# Altium PCB FMDET.PcbDoc
Units mm, origin at the board's own origin, x right, y up, seen from the top; angles counter-clockwise.
Board outline 50 x 50 mm, 4 copper layers (Top Layer, Layer 2, Layer 3, Bottom Layer), stack 1.513 mm thick; 70 components, 34 nets, 163 pads, 173 vias.
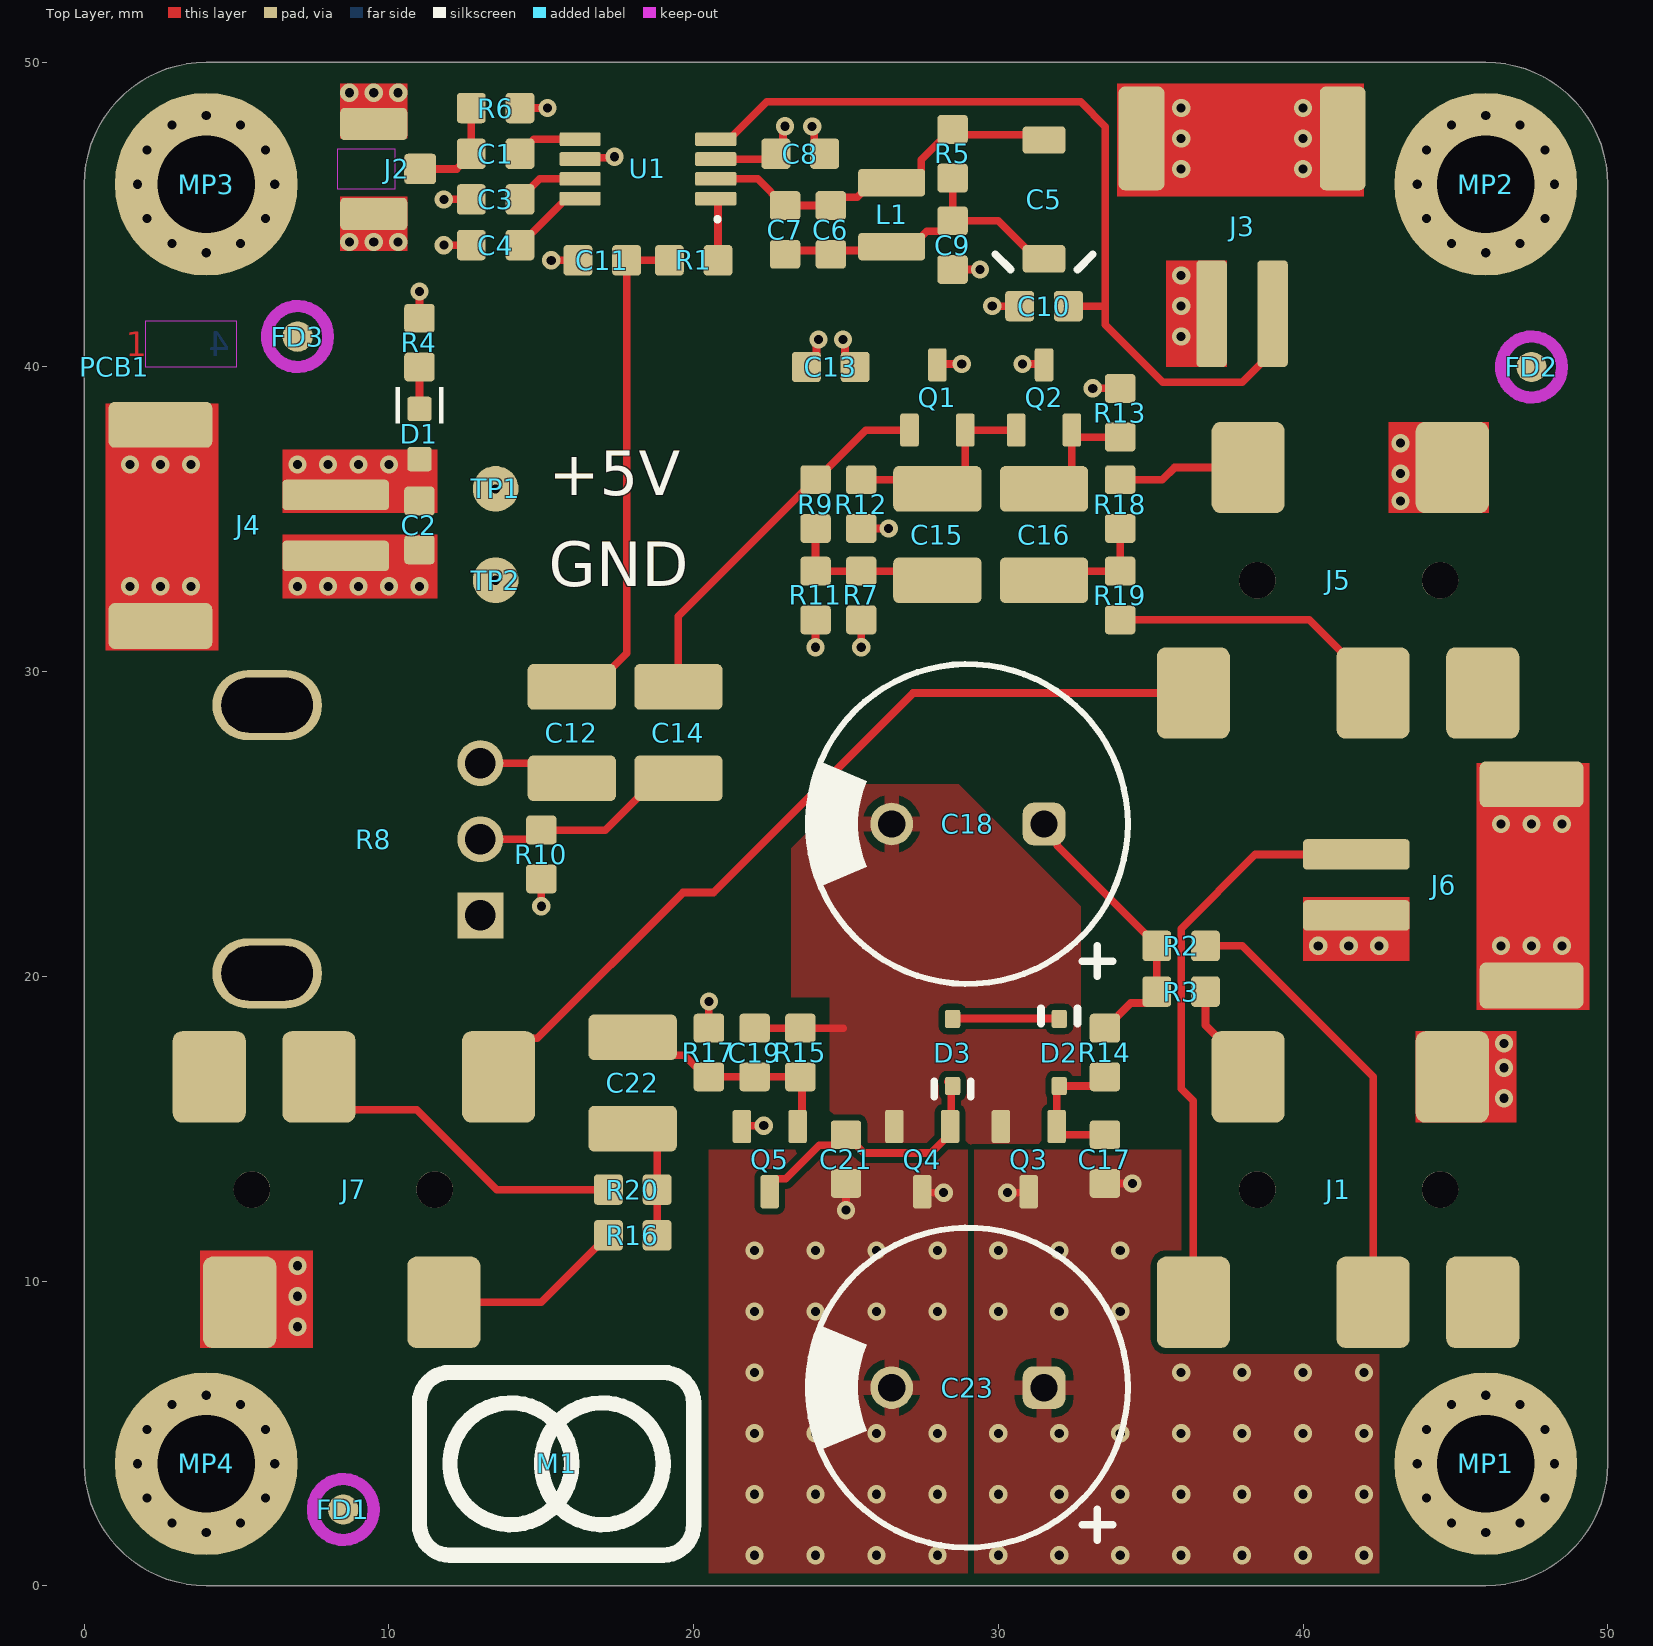
[diagram p0: Top Layer view]
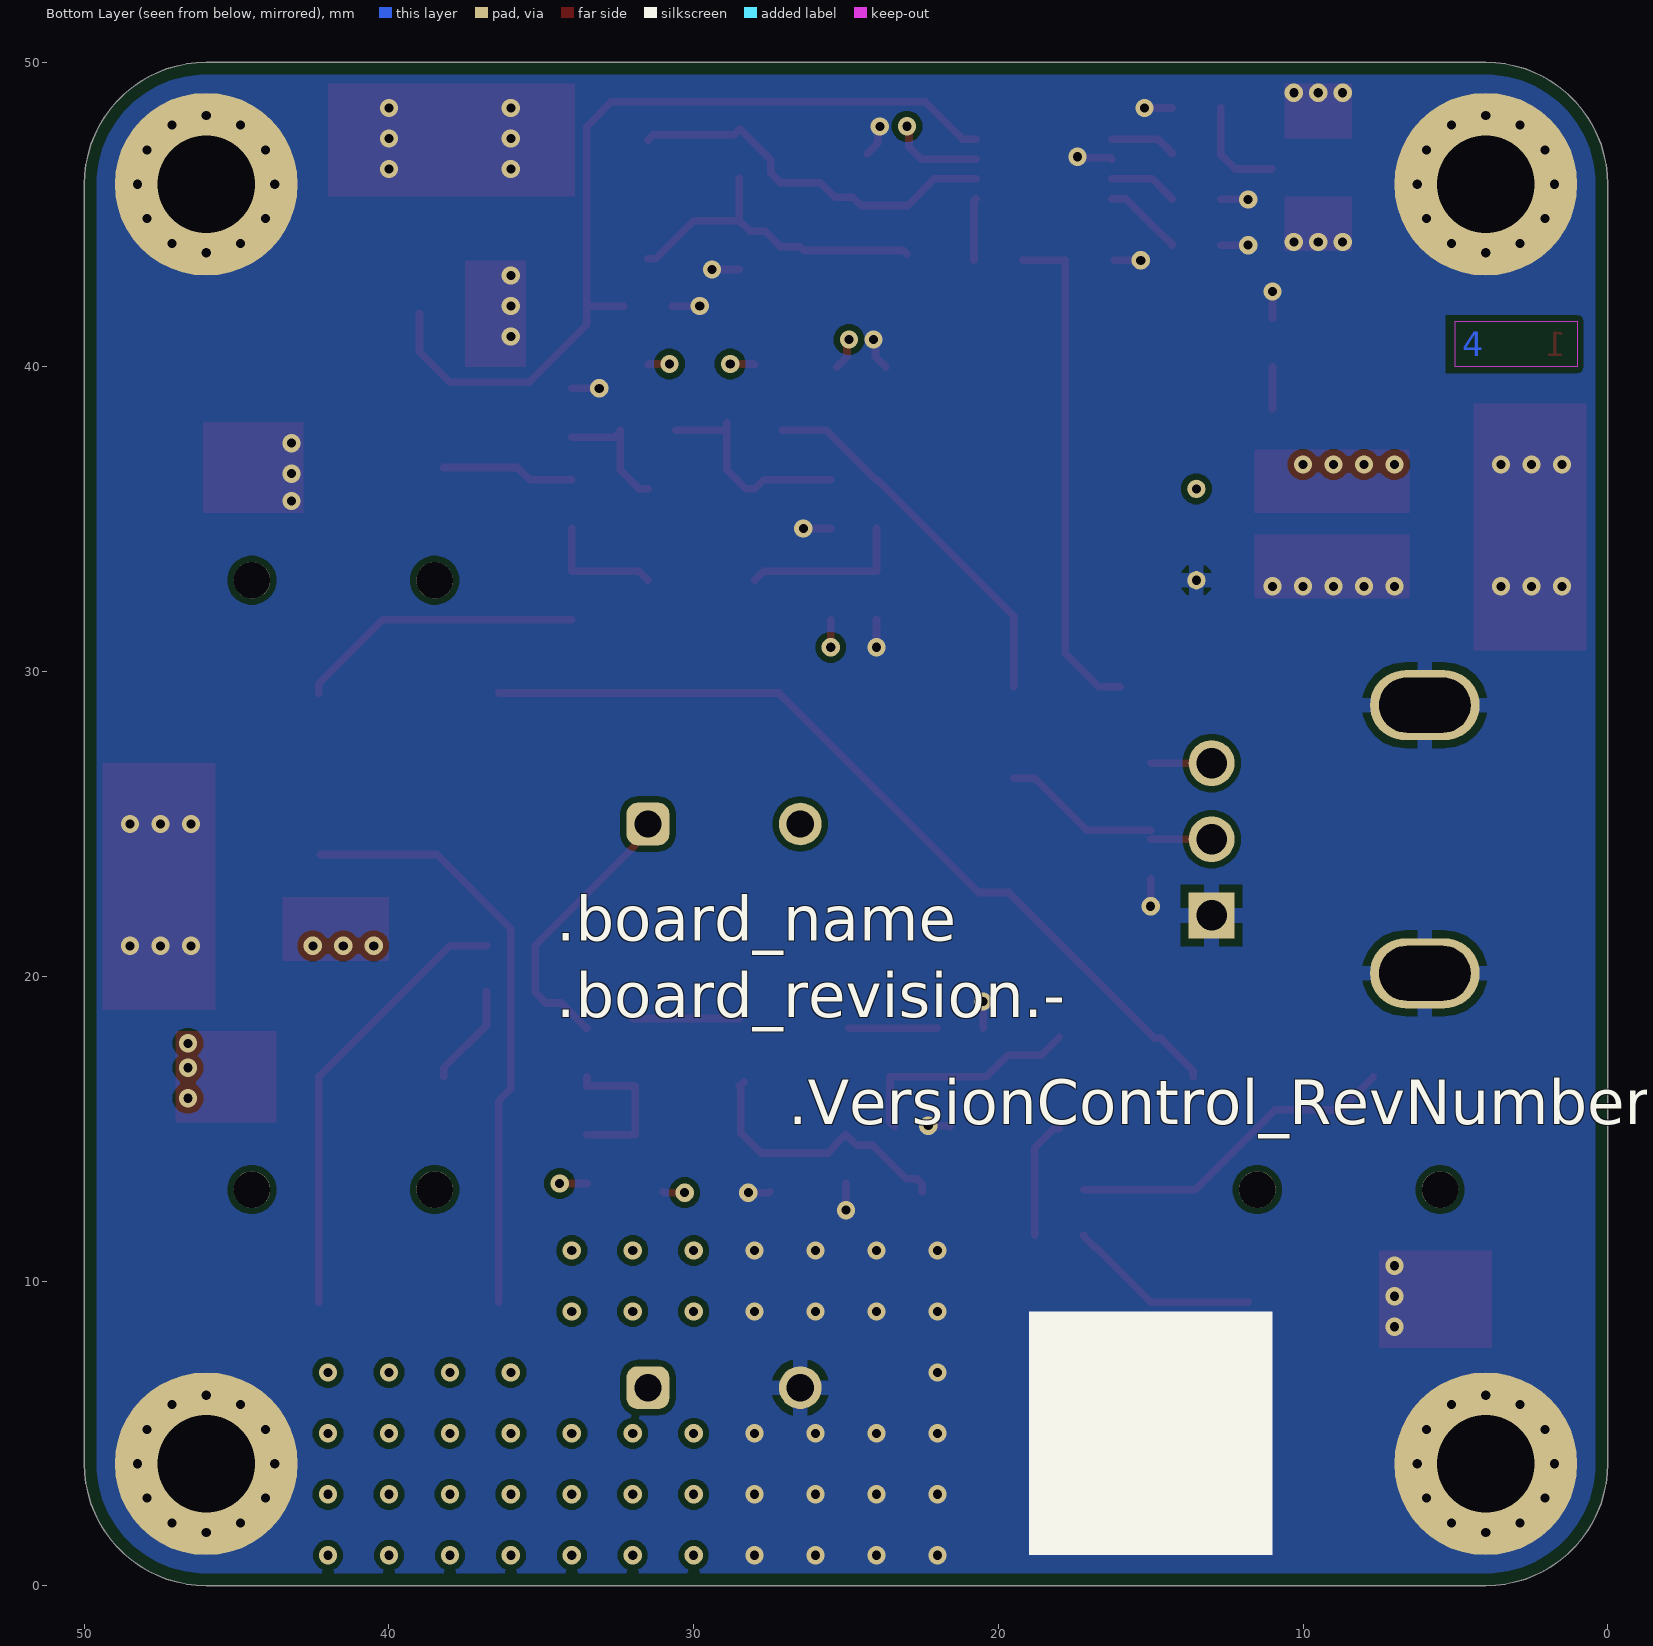
[diagram p1: Bottom Layer view, seen from below]
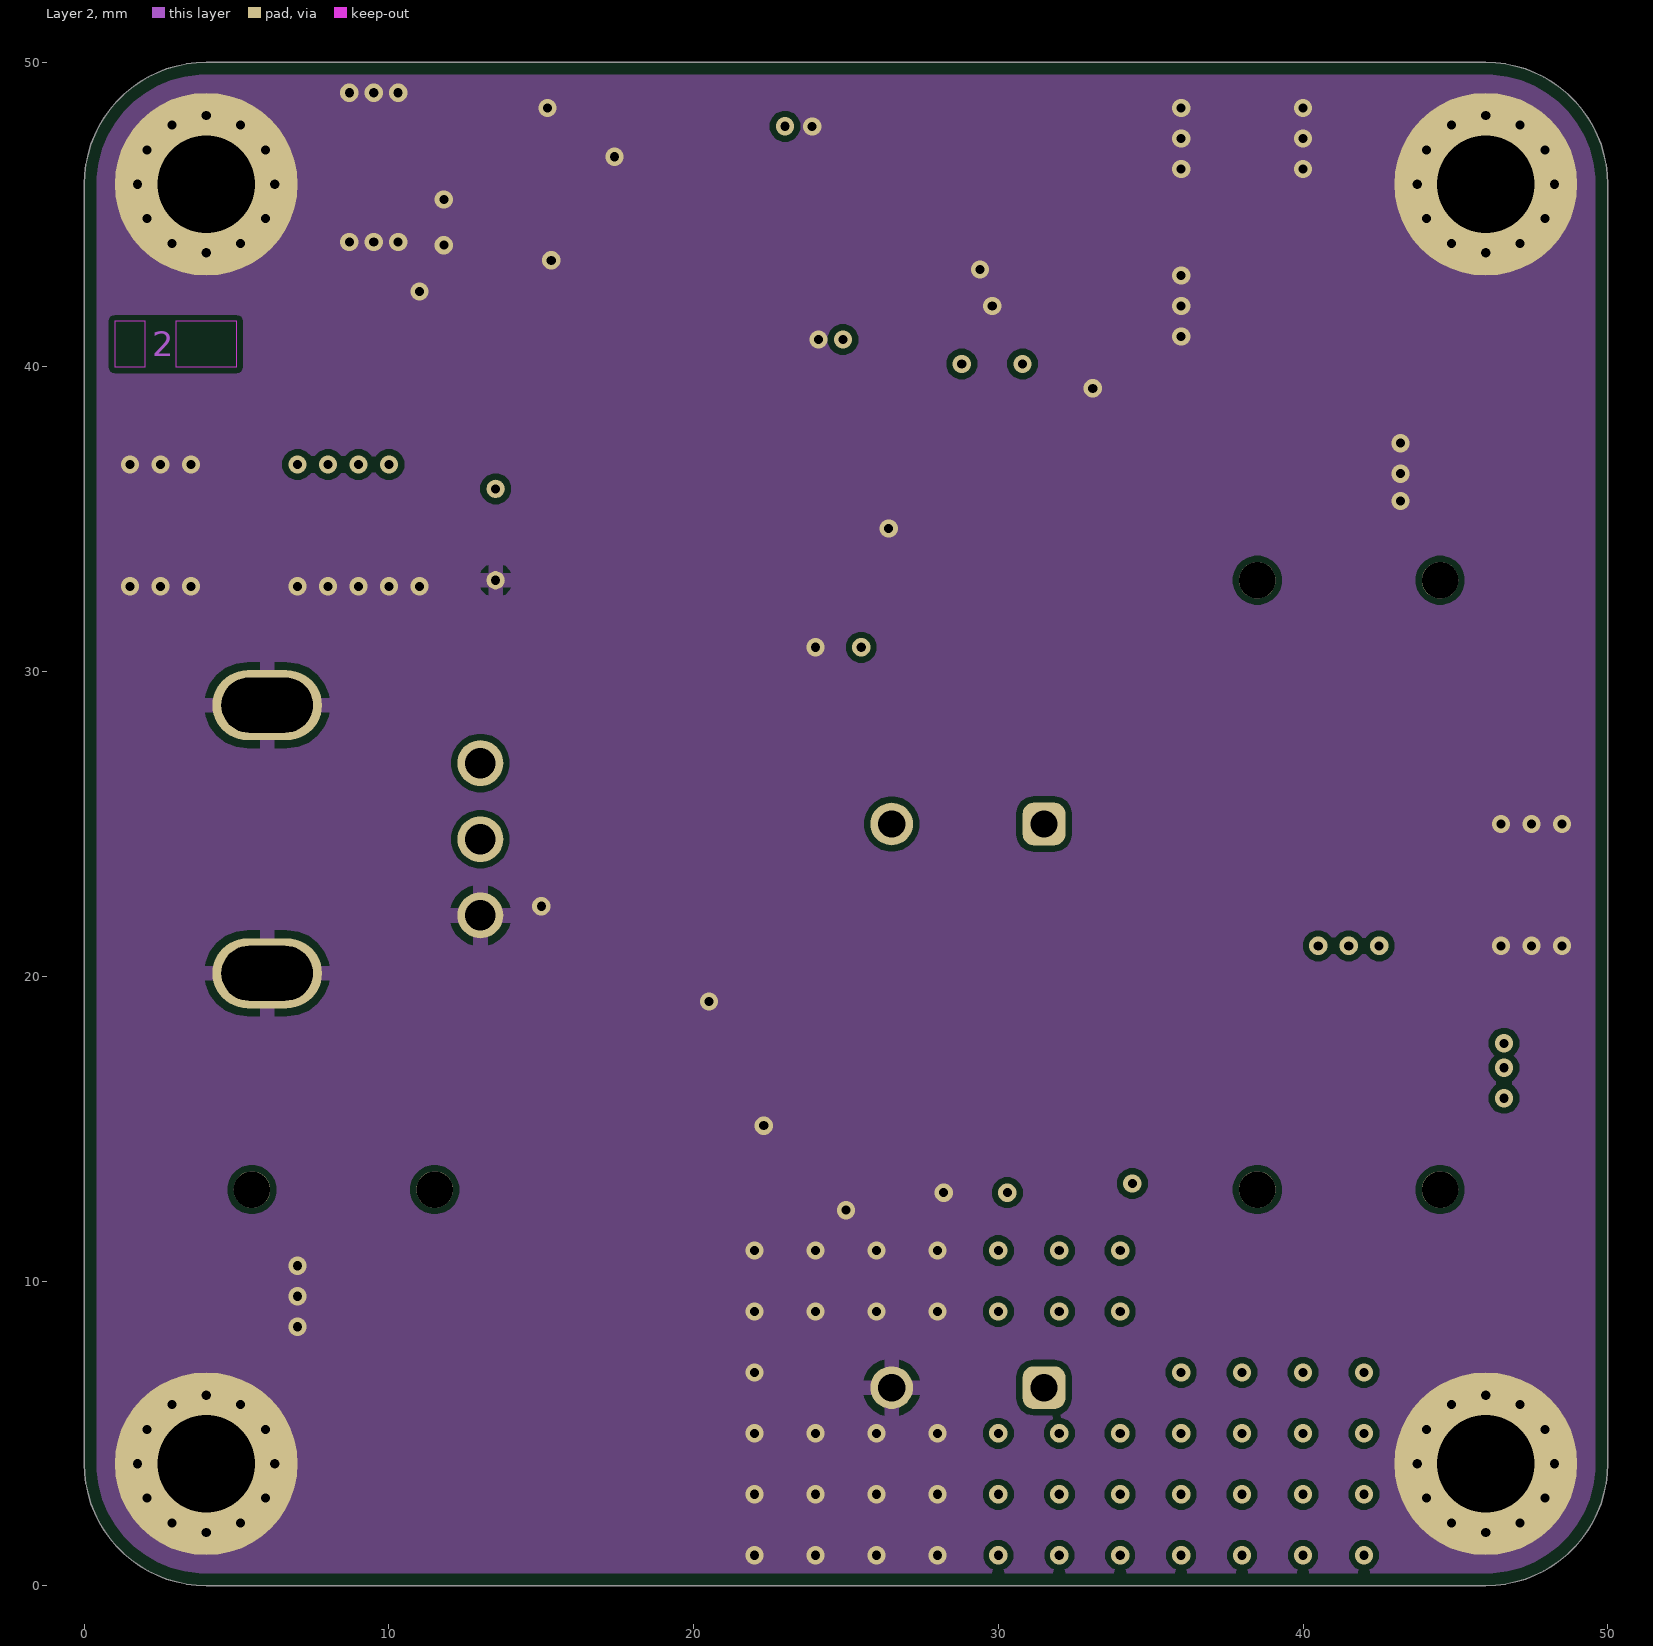
[diagram p2: Layer 2]
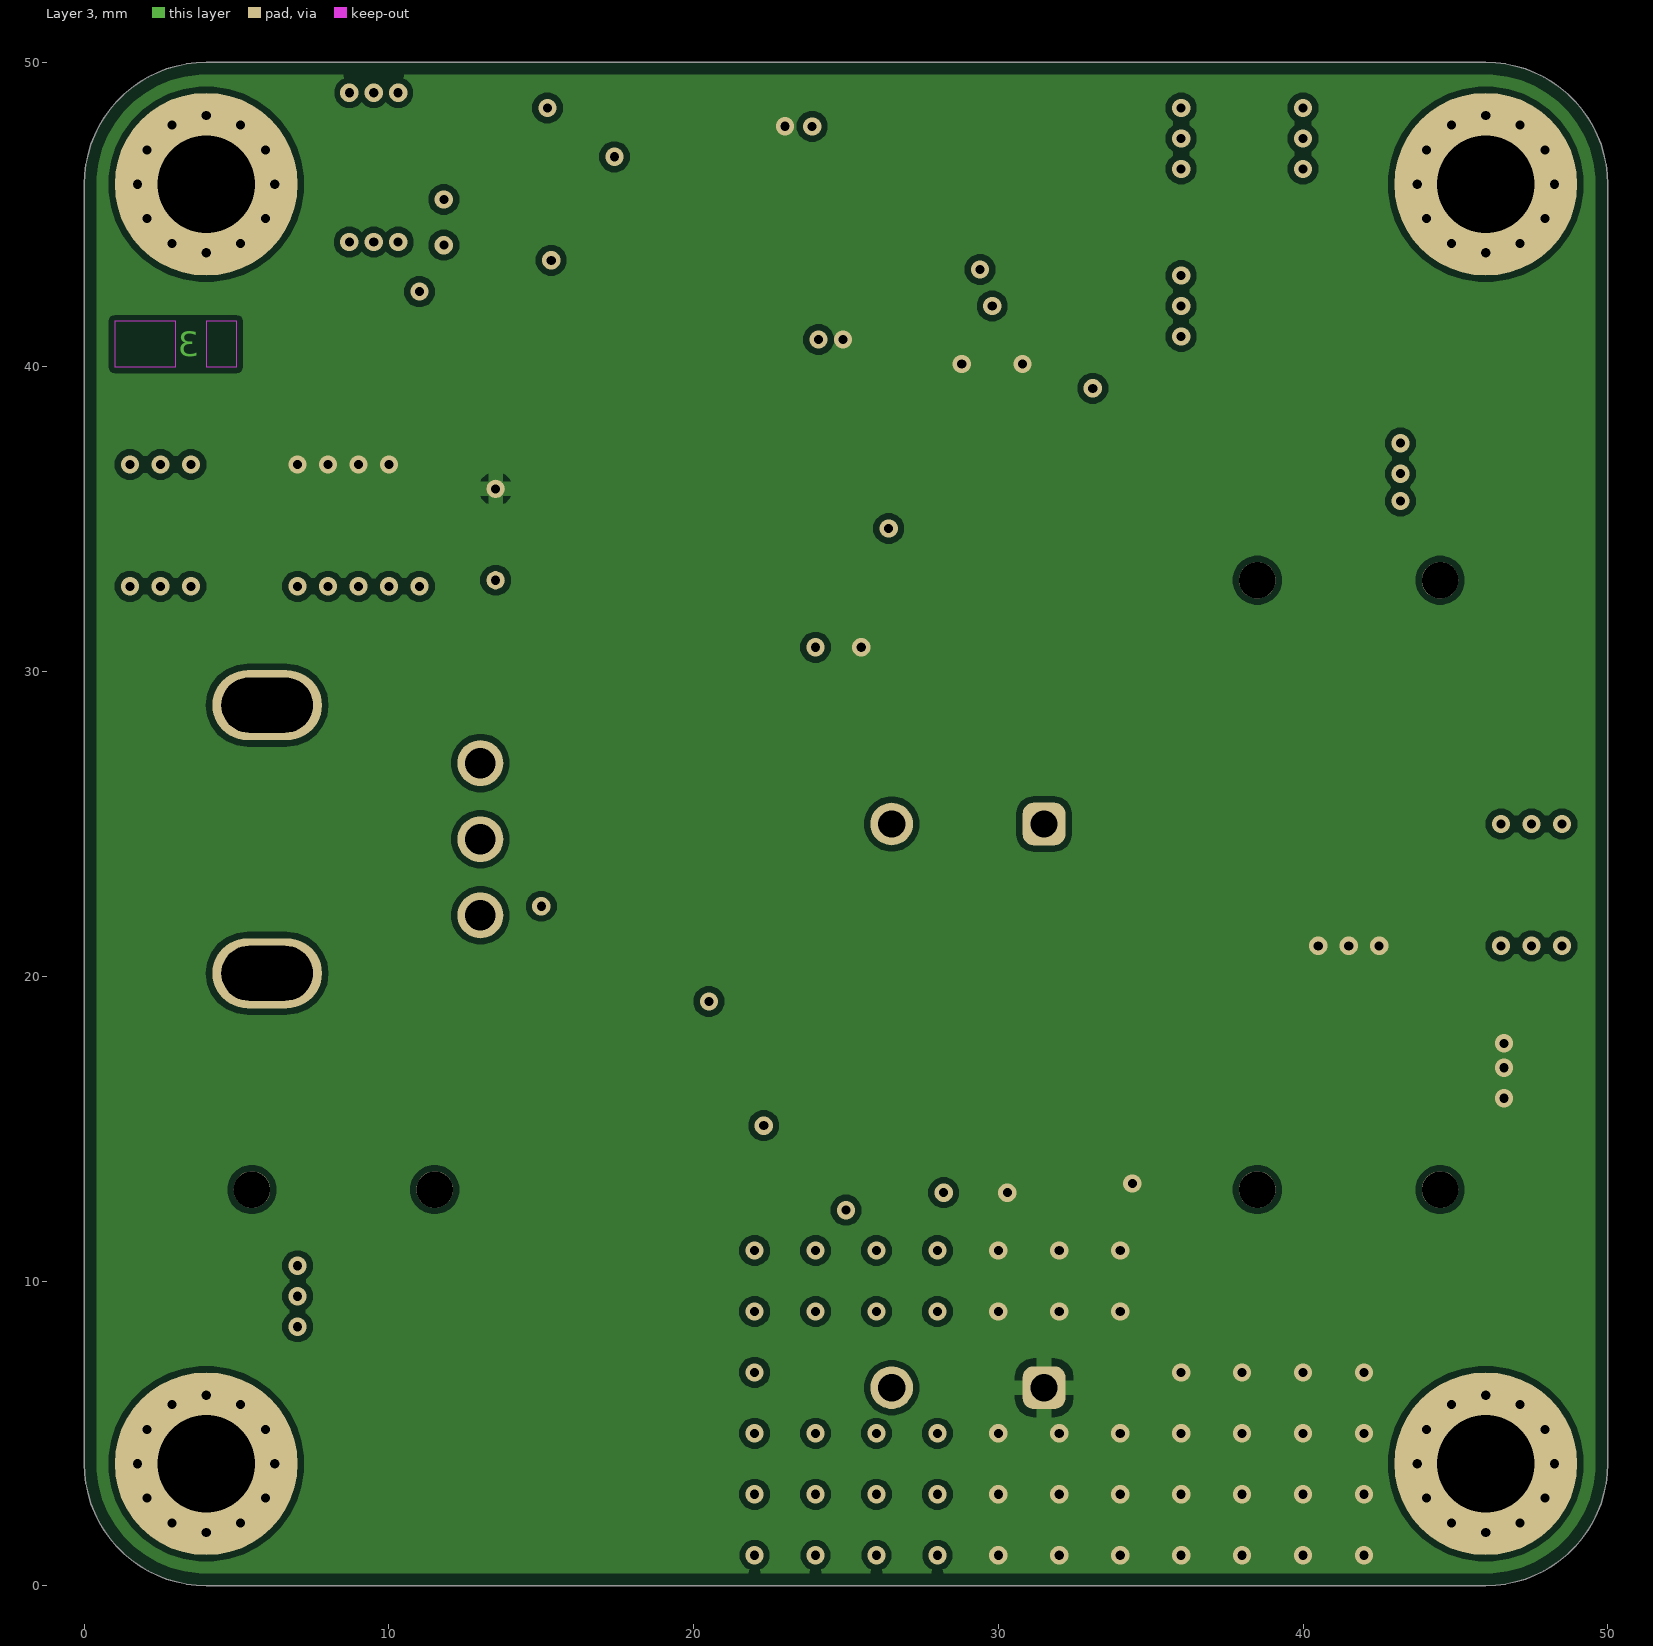
[diagram p3: Layer 3]
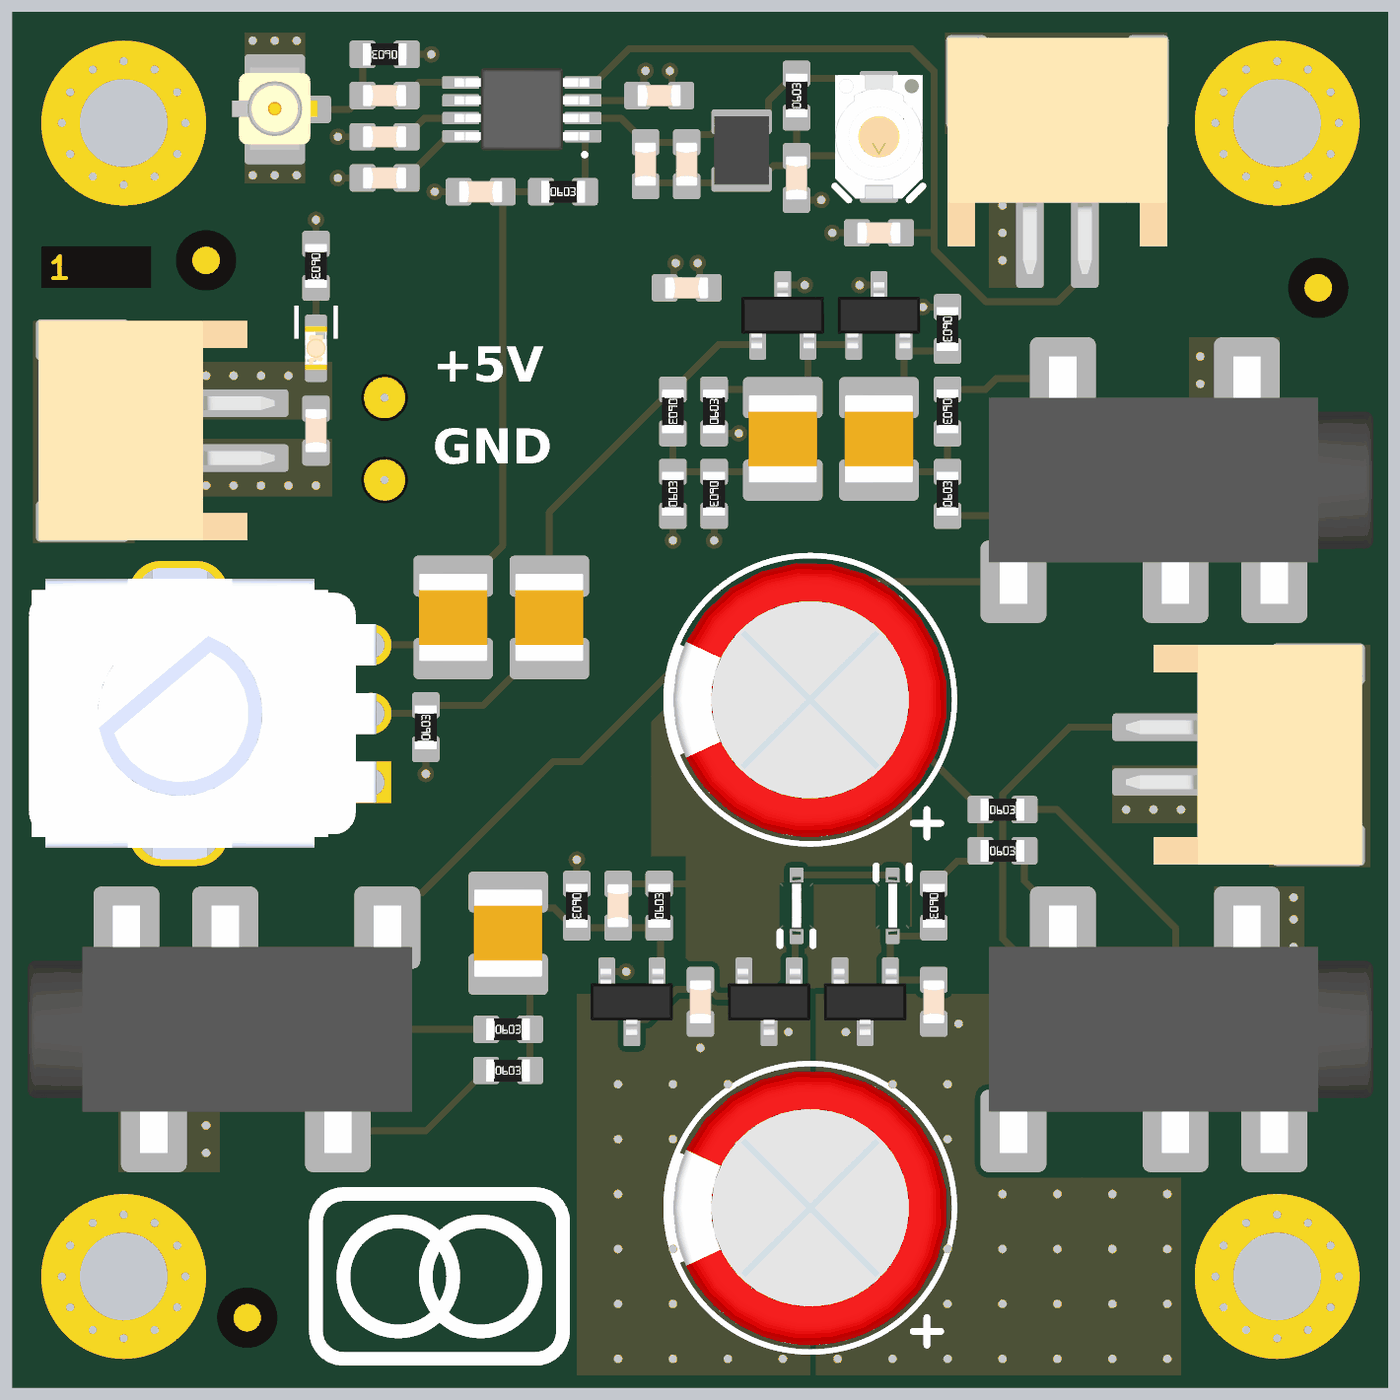
[diagram p4: 3D render of the assembled board from above, using the file's embedded part models]

## Layer stack, top to bottom
Top Solder: solder mask 0.0254, SM-001, Dk 4
Top Layer: signal copper 0.035
Dielectric 2: prepreg 0.2083, PP-022, Dk 4.5
Layer 2: signal copper 0.018
Dielectric 3: core 0.9906, Core-042, Dk 4.6
Layer 3: signal copper 0.018
Dielectric 5: prepreg 0.2083, PP-022, Dk 4.5
Bottom Layer: signal copper 0.035
Bottom Solder: solder mask 0.0254, SM-001, Dk 4

## Board outline
0,4 ccw(c4,4) 4,0 46,0 ccw(c46,4) 50,4 50,46 ccw(c46,46) 46,50 4,50 ccw(c4,46) 0,46

## Design rules (kind name [scope] priority, off if disabled: settings)
BoardOutlineClearance [IsElectrical or IsPoly] p1: gap=0.4 ignorepadtopadclearanceinfootprint=FALSE
Clearance Clearance_SelectiveSoldering [ispad and IsThruPin and not InComponentClass('NoSelectiveSoldering') vs ispad and IsSMTPin] p1 off: gap=4 ignorepadtopadclearanceinfootprint=TRUE // excludes smt studs
Clearance Clearance_NTPH_to_Track [IsTrack vs IsPad and IsThruPin and not PadIsPlated] p2: gap=0.254 ignorepadtopadclearanceinfootprint=TRUE
Clearance Clearance_TH_Pad_to_TH_Pad [IsPad and IsThruPin vs IsPad and IsThruPin] p3: gap=0.5 ignorepadtopadclearanceinfootprint=TRUE
Clearance Clearance_SMT_Pad_to_SMT_Pad [IsPad and IsSMTPin vs IsPad and IsSMTPin] p4: gap=0 ignorepadtopadclearanceinfootprint=TRUE
Clearance Clearance_No_Via_in_Pad [IsPad and not InPadClass('Via_in_pad_allowed') vs (IsVia AND not HasFootprint('PTH-M3D6.5_VIA-RING'))] p5: gap=0.1 ignorepadtopadclearanceinfootprint=TRUE
Clearance Clearance_Others [All] p6: gap=0.2 ignorepadtopadclearanceinfootprint=FALSE except(0.127: SMDPad-SMDPad)
ComponentClearance OverlappingComponents [InComponentClass('Overlap') vs InComponentClass('Overlap')] p1: gap=-10 collisioncheckmode=3 verticalgap=0 showdistances=TRUE donotcheckwithout3dbody=TRUE
ComponentClearance [All] p2: gap=0 collisioncheckmode=3 verticalgap=0.254 showdistances=FALSE
DiffPairsRouting HDMI [InDifferentialPairClass('HDMI')] p1: maxlimit=0.254 minlimit=0.2 mostfreqgap=0.254 toplayer_maxgap=0.2 toplayer_prefgap=0.2 toplayer_minwidth=0.207 toplayer_maxwidth=0.207 toplayer_prefwidth=0.207 midlayer1_minwidth=0.381 midlayer1_maxwidth=0.381 midlayer1_prefwidth=0.381 midlayer2_minwidth=0.381 midlayer2_maxwidth=0.381 midlayer2_prefwidth=0.381 bottomlayer_maxgap=0.2 bottomlayer_prefgap=0.2 bottomlayer_minwidth=0.207 bottomlayer_maxwidth=0.207 bottomlayer_prefwidth=0.207 impedanceprofiledriven=TRUE maxuncoupledlength=12.7
DiffPairsRouting ETH [InDifferentialPairClass('ETH')] p2: maxlimit=0.254 minlimit=0.2 mostfreqgap=0.254 toplayer_maxgap=0.2 toplayer_prefgap=0.2 toplayer_minwidth=0.207 toplayer_maxwidth=0.207 toplayer_prefwidth=0.207 midlayer1_minwidth=0.381 midlayer1_maxwidth=0.381 midlayer1_prefwidth=0.381 midlayer2_minwidth=0.381 midlayer2_maxwidth=0.381 midlayer2_prefwidth=0.381 bottomlayer_maxgap=0.2 bottomlayer_prefgap=0.2 bottomlayer_minwidth=0.207 bottomlayer_maxwidth=0.207 bottomlayer_prefwidth=0.207 impedanceprofiledriven=TRUE maxuncoupledlength=12.7
DiffPairsRouting USB [InDifferentialPairClass('USB')] p3: maxlimit=0.235 minlimit=0.192 mostfreqgap=0.235 toplayer_mingap=0.235 toplayer_minwidth=0.17 toplayer_maxwidth=0.17 toplayer_prefwidth=0.17 midlayer1_maxgap=0.192 midlayer1_prefgap=0.192 midlayer1_minwidth=0.13 midlayer1_maxwidth=0.13 midlayer1_prefwidth=0.13 midlayer2_mingap=0.192 midlayer2_maxgap=0.192 midlayer2_prefgap=0.192 midlayer2_minwidth=0.13 midlayer2_maxwidth=0.13 midlayer2_prefwidth=0.13 bottomlayer_mingap=0.235 bottomlayer_minwidth=0.17 bottomlayer_maxwidth=0.17 bottomlayer_prefwidth=0.17 impedanceprofiledriven=TRUE maxuncoupledlength=12.7
HoleSize NPTH_HoleSize [IsPad And not PadIsPlated] p1: absolutevalues=TRUE maxlimit=3.7 minlimit=0.2 maxpercent=80.000 minpercent=20.000
HoleSize Pad_HoleSize [IsPad] p2: absolutevalues=TRUE maxlimit=4.2 minlimit=0.3 maxpercent=80.000 minpercent=20.000
HoleSize Via_HoleSize [IsVia] p3: absolutevalues=TRUE maxlimit=6.3 minlimit=0.2 maxpercent=80.000 minpercent=20.000
HoleToHoleClearance [All] p1: gap=0.254 allowstackedmicrovias=FALSE
MatchedLengths InterPair_skew_HDMI [InDifferentialPairClass('HDMI')] p1: tolerance=1 checknetsindiffpair=FALSE checkdiffpairvsdiffpair=TRUE checkxsignals=TRUE checkothers=TRUE
MatchedLengths IntraPair_skew_all_DiffPairs [InDifferentialPairClass('All Differential Pairs')] p2: tolerance=0.15 checknetsindiffpair=TRUE checkdiffpairvsdiffpair=FALSE checkxsignals=FALSE checkothers=FALSE
MinimumAnnularRing [All] p1: minimumring=0.13
MinimumSolderMaskSliver [All] p1: minsoldermaskwidth=0.2
PolygonConnect PolygonConnect_NonSoldering [All vs InComponentClass('NonSolder')] p1: connectstyle=Direct reliefconductorwidth=0.254 reliefentries=4 polygonreliefangle="90 Angle" airgapwidth=0.254
PolygonConnect [All] p2: thpad.connectstyle=Relief thpad.reliefconductorwidth=0.5 thpad.reliefentries=4 thpad.polygonreliefangle="90 Angle" thpad.airgapwidth=0.254 smdpad.connectstyle=Direct smdpad.reliefconductorwidth=0.5 smdpad.reliefentries=4 smdpad.polygonreliefangle="90 Angle" smdpad.airgapwidth=0.254 via.connectstyle=Direct via.reliefconductorwidth=0.5 via.reliefentries=4 via.polygonreliefangle="90 Angle" via.airgapwidth=0.254
RoutingVias [All] p1: holewidth=0.3 width=0.6 viastyle="Through Hole" minholewidth=0.3 minwidth=0.6 maxholewidth=0.3 maxwidth=0.6
SilkToSolderMaskClearance [IsPad] p1: minsilkscreentomaskgap=0.2 clearancetoexposedcopper=TRUE
SolderMaskExpansion SolderMaskExpansion_Via [IsVia] p1: expansion=0.102 istentingtop=TRUE
SolderMaskExpansion SolderMaskExpansion_notVia [not IsVia] p2: expansion=0.05 istentingtop=FALSE
SupplyNets "Schematic Supply Nets_1" [InNet('+5V')] p1: voltage=0.000
SupplyNets "Schematic Supply Nets_2" [InNet('GND')] p2: voltage=0.000
Width S50_Width [InNetClass('S50')] p1: maxlimit=0.172 minlimit=0.133 preferedwidth=0.172 toplayer_minwidth=0.172 midlayer1_maxwidth=0.133 midlayer1_prefwidth=0.133 midlayer2_minwidth=0.137 midlayer2_maxwidth=0.137 midlayer2_prefwidth=0.137 bottomlayer_minwidth=0.172 impedanceprofiledriven=TRUE minimp=50.000000 maximp=50.000000 favimp=50.000000
Width Default_Width [All] p2: maxlimit=2.5 minlimit=0.15 preferedwidth=0.33
24 further rules are at their usual default settings.

## Classes and differential pairs
component class NonSolder: MP1 MP2 MP3 MP4

## Components (designator, comment, footprint, x,y, rotation, side; value= is the part's Value field where it differs from the comment)
C1 "Capacitor 10nF +/-10% 50V X7R 0603" 0603-C-N 13.5,47 r180 top value=10nF
C2 "Capacitor 100nF +/-10% 50V X7R 0603" 0603-C-N 11,34.8 r90 top value=100nF
C3 "Capacitor 10nF +/-10% 50V X7R 0603" 0603-C-N 13.5,45.5 r0 top value=10nF
C4 "Capacitor 10nF +/-10% 50V X7R 0603" 0603-C-N 13.5,44 r0 top value=10nF
C5 "SGC3S100" SGC3S100-Footprint-1 31.5,45.5 r90 top value=10pF
C6 "Capacitor 82pF +/-5% 50V C0G 0603" 0603-C-N 24.5,44.5 r90 top value=82pF
C7 "Capacitor 10pF +/-5% 50V NP0 0603" 0603-C-N 23,44.5 r90 top value=10pF
C8 "Capacitor 100nF +/-10% 50V X7R 0603" 0603-C-N 23.5,47 r180 top value=100nF
C9 "Capacitor 10nF +/-10% 50V X7R 0603" 0603-C-N 28.5,44 r90 top value=10nF
C10 "Capacitor 1nF +/-10% 50V X7R 0603" 0603-C-N 31.5,42 r0 top value=1nF
C11 "Capacitor 10nF +/-10% 50V X7R 0603" 0603-C-N 17,43.5 r0 top value=10nF
C12 "Capacitor 10µF +/-10% 50V X7R 1210" WCAP-CSGP_1210_L3.2W2.5H2.5 16,28 r270 top value=10µF
C13 "Capacitor 100nF +/-10% 50V X7R 0603" 0603-C-N 24.5,40 r0 top value=100nF
C14 "Capacitor 10µF +/-10% 50V X7R 1210" WCAP-CSGP_1210_L3.2W2.5H2.5 19.5,28 r90 top value=10µF
C15 "Capacitor 10µF +/-10% 50V X7R 1210" WCAP-CSGP_1210_L3.2W2.5H2.5 28,34.5 r90 top value=10µF
C16 "Capacitor 10µF +/-10% 50V X7R 1210" WCAP-CSGP_1210_L3.2W2.5H2.5 31.5,34.5 r270 top value=10µF
C17 "Capacitor 4.7nF +/-5% 50V X7R 0603" 0603-C-N 33.5,14 r270 top value=4.7nF
C18 "860080275016" WCAP-ATLI_D10H16 29,25 r180 top value=1mF
C19 "Capacitor 68pF +/-5% 50V C0G 0603" 0603-C-N 22,17.5 r90 top value=68pF
C21 "Capacitor 4.7nF +/-5% 50V X7R 0603" 0603-C-N 25,14 r270 top value=4.7nF
C22 "Capacitor 10µF +/-10% 50V X7R 1210" WCAP-CSGP_1210_L3.2W2.5H2.5 18,16.5 r270 top value=10µF
C23 "860080275016" WCAP-ATLI_D10H16 29,6.5 r180 top value=1mF
D1 "150060GS84000" WL-SMCW_0603_150060xx8x000 11,37.8 r270 top
D2 "1N4148WS" SOD323-MFG 32,17.5 r270 top
D3 "1N4148WS" SOD323-MFG 28.5,17.5 r90 top
FD1 "FID1X2R" FID1X2R 8.5,2.5 r90 top
FD2 "FID1X2R" FID1X2R 47.5,40 r90 top
FD3 "FID1X2R" FID1X2R 7,41 r90 top
J1 "SJ2-35863B1-SMT-TR" SJ2-35863B1-SMT-TR-Footprint-1 42.5,13 r180 top value="3.5mm audio jack"
J2 "U.FL-R-SMT(10)" HRS-U.FL-R-SMT_V 9.5,46.5 r90 top value=U.FL
J3 "620102131822" 620102131822 38,43.5 r180 top value=JST-PH
J4 "620102131822" 620102131822 6.5,34.8 r270 top value=JST-PH
J5 "SJ2-35863B1-SMT-TR" SJ2-35863B1-SMT-TR-Footprint-1 42.5,33 r180 top value="3.5mm audio jack"
J6 "620102131822" 620102131822 43.5,23 r90 top value=JST-PH
J7 "SJ2-35863B1-SMT-TR" SJ2-35863B1-SMT-TR-Footprint-1 7.5,13 r0 top value="3.5mm audio jack"
L1 "744762322A" WE-RFI_1008 26.5,45 r90 top
M1 "Logo" LOGO_9x6mm 15.5,4 r0 top
MP1 "MountingHole" PTH-M3D6.5_VIA-RING 46,4 r0 top
MP2 "MountingHole" PTH-M3D6.5_VIA-RING 46,46 r0 top
MP3 "MountingHole" PTH-M3D6.5_VIA-RING 4,46 r0 top
MP4 "MountingHole" PTH-M3D6.5_VIA-RING 4,4 r0 top
PCB1 "Layer_indicator_4" LayerId_4L_4x1.5mm 1,40 r0 top
Q1 "MMBT3904" SOT-23-3-N 28,39 r90 top
Q2 "MMBT3904" SOT-23-3-N 31.5,39 r90 top
Q3 "ZXTN4240F-7" SOT-23-3-N 31,14 r270 top
Q4 "ZXTP5240F-7" SOT-23-3-N 27.5,14 r270 top
Q5 "ZXTN4240F-7" SOT-23-3-N 22.5,14 r270 top
R1 "Resistor 8.2k +/-1% 0.1W 0603" 0603-R-N 20,43.5 r0 top value=8.2k
R2 "Jumper 0R <50 mOhm 1A 0603" 0603-R-N 36,21 r0 top value=0
R3 "Jumper 0R <50 mOhm 1A 0603" 0603-R-N 36,19.5 r0 top value=0
R4 "Resistor 10k +/-1% 50V 0603" 0603-R-N 11,40.8 r270 top value=10k
R5 "Resistor 2.7k +/-1% 0.1W 0603" 0603-R-N 28.5,47 r90 top value=2.7k
R6 "Resistor 51R +/-1% 0.1W 0603" 0603-R-N 13.5,48.5 r180 top value=51
R7 "Resistor 120K +/-1% 0603 0.1W" 0603-R-N 25.5,32.5 r270 top value=120k
R8 "PTV09A-4020F-B104" PTV09A-4020F-B104-Footprint-1 6,24.5 r90 top value=100kΩ
R9 "Resistor 47k +/-1% 50V 0603" 0603-R-N 24,35.5 r270 top value=47k
R10 "Resistor 22k +/-1% 50V 0603" 0603-R-N 15,24 r90 top value=22k
R11 "Resistor 390k +/-1% 50V 0603" 0603-R-N 24,32.5 r90 top value=390k
R12 "Resistor 33k +/-1% 50V 0603" 0603-R-N 25.5,35.5 r90 top value=33k
R13 "Resistor 680R +/-1% 0.1W 0603" 0603-R-N 34,38.5 r270 top value=680
R14 "Resistor 1k +/-1% 50V 0603" 0603-R-N 33.5,17.5 r270 top value=1k
R15 "Resistor 18k +/-1% 50V 0603" 0603-R-N 23.5,17.5 r90 top value=18k
R16 "Resistor 2.4k +/-1% 50V 0603" 0603-R-N 18,11.5 r0 top value=2.4k
R17 "Resistor 5.6k +/-1% 0.1W 0603" 0603-R-N 20.5,17.5 r270 top value=5.6k
R18 "Jumper 0R <50 mOhm 1A 0603" 0603-R-N 34,35.5 r270 top value=0
R19 "Jumper 0R <50 mOhm 1A 0603" 0603-R-N 34,32.5 r90 top value=0
R20 "Resistor 2.4k +/-1% 50V 0603" 0603-R-N 18,13 r0 top value=2.4k
TP1 "Testpad with multiple sizes" TP_1.5mm_0.3mmHole 13.5,36 r270 top
TP2 "Testpad with multiple sizes" TP_1.5mm_0.3mmHole 13.5,33 r270 top
U1 "NJM14570RB1-TE1" MSOP8 18.5,46.5 r180 top

## Footprints (in the part's own frame and the unit in brackets; to place one, negate y for a bottom-side part, rotate by r counter-clockwise, add the part's x,y. Pads: shape width x height; smd on the part's side, far side on the other; paste and mask are expansions set on the pad)
0603-C-N [mm]
  rrect25% 0.95x1 smd: 1(-0.8,0) 2(0.8,0)
  body extent -0.8,-0.4 0.8,0.4, height 0.81
0603-R-N [mm]
  rrect25% 0.95x1 smd: 1(-0.8,0) 2(0.8,0)
  body extent -0.8,-0.4 0.8,0.4, height 0.47
620102131822 [mm] "2.00mm SMT Male Horizontal Shrouded Header, 2p"
  rrect25% 1x3.5 smd: 1(-1,1.75) 2(1,1.75)
  rrect25% 1.5x3.4 smd: MP1(-3.3,-4) MP2(3.3,-4)
  body extent -4,-5.6 4,3, height 5.57
FID1X2R [mm] "Fiducial - Round 1x2mm"
  round 1 smd paste-0.75 mask+0.6: 0(0,0)
  Top Layer keep-out circle w0.4: c0,0 r1
HRS-U.FL-R-SMT_V [mm] "SMD, 3-Leads, Body 2.6x2.6mm"
  rrect25% 1.05x2.2 smd: 1(-1.475,0) 2(1.475,0)
  rrect25% 1x1.05 smd: 3(0,-1.525)
  Top Layer keep-out region: -0.65,-0.7 0.65,-0.7 0.65,1.2 -0.65,1.2
  body extent -1.48,-1.55 1.52,1.55, height 1.25
LayerId_4L_4x1.5mm [mm]
  Top Layer keep-out region: 1,0 4,0 4,1.5 1,1.5
  Layer 2 keep-out region: 2,0 4,0 4,1.5 2,1.5
  Layer 2 keep-out region: 0,0 1,0 1,1.5 0,1.5
  Layer 3 keep-out region: 3,0 4,0 4,1.5 3,1.5
  Layer 3 keep-out region: 0,0 2,0 2,1.5 0,1.5
  Bottom Layer keep-out region: 0,0 4,0 4,1.5 0,1.5
LOGO_9x6mm [mm]
  silkscreen extent -4.5,-3 4.5,3
MSOP8 [mm] "TSOP, 8-Leads, Body 3.1x3.1mm, Pitch 0.65mm, IPC Medium Density"
  rrect22% 1.35x0.45 smd: 1(-2.225,0.975) 2(-2.225,0.325) 3(-2.225,-0.325) 4(-2.225,-0.975) 5(2.225,-0.975) 6(2.225,-0.325) 7(2.225,0.325) 8(2.225,0.975)
  silkscreen extent -2.3,1.64 -2.28,1.66, body extent -2.45,-1.5 2.45,1.5, height 0.94
PTH-M3D6.5_VIA-RING [mm]
  round 6 hole 3.2: 1(0,0)
PTV09A-4020F-B104-Footprint-1 [mm]
  rect 1.508x1.508 / inner round 1.508 / far side rect 1.508x1.508 hole 1: 1(-2.5,-7)
  round 1.508 hole 1: 2(0,-7) 3(2.5,-7)
  oval 2.3x3.6 hole 1.8 slot 3 at 90 deg: S1(-4.4,0) S2(4.4,0)
  body extent -5.64,-7.2 5.64,5.45, height 19.96
SGC3S100-Footprint-1 [mm]
  rrect25% 0.9x1.4 smd: 1(-1.95,0) 2(1.95,0)
  silkscreen extent -2.3,-1.6 -1.8,1.6, body extent -2.25,-1.6 2.25,1.6, height 1.45
SJ2-35863B1-SMT-TR-Footprint-1 [mm]
  rrect25% 2.4x3 smd: 1(-2.4,-3.7) 2(4.3,-3.7) 3(0.2,3.7) 4(6.1,3.7) 5(-3.4,3.7)
  round 1.2 hole 1.2 unplated: MP1(-2,0) MP2(4,0)
  body extent -7,-4.5 7,4.5, height 5
SOD323-MFG [mm]
  rrect25% 0.59x0.5 smd paste+0 mask+0: 1(-1.1,0) 2(1.1,0)
  silkscreen extent -1.45,-0.6 -0.95,0.6, body extent -1.53,-0.77 1.53,0.77, height 0.25
SOT-23-3-N [mm] "SOT-23, 3-Leads, Body 3x1.4mm, Pitch 0.95mm, IPC Medium Density"
  rrect25% 1.09x0.61 smd: 1(-1.07,0.915) 2(-1.07,-0.915) 3(1.07,0)
  body extent -1.22,-1.5 1.22,1.5, height 1
TP_1.5mm_0.3mmHole [mm] "Centering hole to keep your DMM-probe in place so that it doesn't skid off to other signals."
  round 1.5 / inner round 0.6 / far side round 0.6 hole 0.3 mask+0.102: 1(0,0)
WCAP-ATLI_D10H16 [mm] "Aluminum Electrolytic Capacitors, 10x16mm"
  rrect50% 1.4x1.4 hole 0.9: 1(-2.5,0)
  round 1.4 hole 0.9: 2(2.5,0)
  silkscreen extent -5.25,-5.25 5.25,5.25, body extent -5,-5 4.99,5, height 16.31
WCAP-CSGP_1210_L3.2W2.5H2.5 [mm] "Ceramic Capacitors, body 3.2x2.5mm"
  rrect25% 1.5x2.9 smd: 1(-1.5,0) 2(1.5,0)
  body extent -1.6,-1.25 1.6,1.25, height 2.5
WE-RFI_1008 [mm] "Ferrite SMD Inductor, body 2.50x2.00mm, 2-Leads"
  rrect25% 0.9x2.2 smd: 1(-1.05,0) 2(1.05,0)
  body extent -1.25,-1 1.25,1, height 1.65
WL-SMCW_0603_150060xx8x000 [mm] "SMD Mono-color Chip LED, body 1.6x0.8mm"
  rrect25% 0.8x0.8 smd: 1(-0.825,0) 2(0.825,0)
  silkscreen extent -1.55,-0.78 -0.35,0.79, body extent -0.8,-0.4 0.8,0.4, height 0.95

## Part data
C1 C3 C4 C9 C11: library part CMP-001-00089-18, "Capacitor MLCC, General Purpose, size 0603, X7R, 10nF, +/-10%, 50V", Capacitor Type=MLCC, Case/Package=0603, Dielectric=X7R, JLCPCB Part #=C57112, Max Operating Temperature=125°C, Min Operating Temperature=-55°C, Tolerance=10%, Voltage Rating=50V, Height=0.8mm, Length=1.6mm, Mounting Technology=SMT, Packaging="Cut Tape", Pins=2, REACH SVHC="No SVHC", RoHS Compliant=True, Usage="General Purpose", Width=0.8mm
C2 C8 C13: library part CMP-001-00017-25, "Capacitor MLCC, General Purpose, size 0603, X7R, 100nF, +/-10%, 50V", Capacitor Type=MLCC, Case/Package=0603, Dielectric=X7R, JLCPCB Basic part=Yes, JLCPCB Part #=C14663, Max Operating Temperature=125°C, Min Operating Temperature=-55°C, Tolerance=10%, Voltage Rating=50V, Height=0.8mm, Length=1.6mm, Mounting Technology=SMT, Page Part #=CCQK104, Pins=2, RoHS Compliant=True, Usage="General Purpose", Width=0.8mm
C5: library part CMP-001-00152-1, "Variable Capacitor, Ceramic, 500V, 50% +Tol, 0% -Tol, 3pF Min, 10pF Max, Vertical Adjuster, Surface Mount", Case/Package=SMD/SMT, Dielectric Material=Ceramic, JLCPCB Part #=C22468121, Max Operating Temperature=85°C, Min Operating Temperature=-40°C, Voltage Rating=500V, Height=1.5mm, Height - Seated (Max)=1.4986mm, Lead Free="Lead Free", Length=4.5mm, Lifecycle Status=Obsolete, Mounting Technology="Surface Mount", RoHS=Compliant, Termination=SMD/SMT, Voltage Rating (DC)=500V, Width=3.2mm
C6: library part CMP-001-00134-3, "Multilayer Ceramic Chip Capacitor, General Purpose, size 0603, C0G, 82pF, 50VDC", Capacitor Type=MLCC, Case/Package=0603, Dielectric=C0G, Max Operating Temperature=125°C, Min Operating Temperature=-55°C, Tolerance=5%, Voltage Rating=50V, Mounting Technology=SMT, Packaging="Tape and Reel", RoHS Compliant=Yes, Usage="General Purpose"
C7: library part CMP-072-000122-18, "WCAP-CSGP Multilayer Ceramic Chip Capacitor, General Purpose, size 0603, NP0, 10pF, 50VDC", Capacitor Type=MLCC, Case/Package=0603, Dielectric=NP0, Insulation Resistance=10GO, JLCPCB Part #=C106245, Max Operating Temperature=125°C, Min Operating Temperature=-55°C, Tolerance=5%, Voltage Rating=50V, ComponentLink1Description="Website Link", ComponentLink1URL=https://www.we-online.com/redexpert/article/885012006051?ad, ComponentLink2Description="Datasheet Link", ComponentLink2URL=https://www.we-online.com/redexpert/spec/885012006051?ad, Design Item ID=885012006051, Height=0.8mm, Length=1.6mm, Match Code=WCAP-CSGP, Mounting Technology=SMT, Packaging="Tape and Reel", Page Part #=CCQJ100, Pins=2, Q Factor=600, Source=WCAP-CSGP.SchLib, Technical Reference=NP00603100J050DFCT10000, Usage="General Purpose", Width=0.8mm
C10: library part CMP-072-000605-15, "WCAP-CSGP Multilayer Ceramic Chip Capacitor, General Purpose, size 0603, X7R, 1nF, 50VDC", Capacitor Type=MLCC, Case/Package=0603, Dielectric=X7R, Insulation Resistance=10GO, JLCPCB Part #=C1588, Max Operating Temperature=125°C, Min Operating Temperature=-55°C, Tolerance=10%, Voltage Rating=50V, ComponentLink1Description="Website Link", ComponentLink1URL=https://www.we-online.com/redexpert/article/885012206083?ad, ComponentLink2Description="Datasheet Link", ComponentLink2URL=https://www.we-online.com/redexpert/spec/885012206083?ad, Design Item ID=885012206083, Dissipation Factor=2.5%, Height=0.8mm, Length=1.6mm, Match Code=WCAP-CSGP, Mounting Technology=SMT, Packaging="Tape and Reel", Pins=2, Source=WCAP-CSGP.SchLib, Technical Reference=X7R0603102K050DFCT10000, Usage="General Purpose", Width=0.8mm
C12 C14 C15 C16 C22: library part CMP-072-000922-16, "WCAP-CSGP Multilayer Ceramic Chip Capacitor, General Purpose, size 1210, X7R, 10µF, 50VDC", Capacitor Type=MLCC, Case/Package=1210, Dielectric=X7R, Insulation Resistance=0.01GO, JLCPCB Part #=C77102, Max Operating Temperature=125°C, Min Operating Temperature=-55°C, Tolerance=10%, Voltage Rating=50V, ComponentLink1Description="Website Link", ComponentLink1URL=https://www.we-online.com/redexpert/article/885012209073?ad, ComponentLink2Description="Datasheet Link", ComponentLink2URL=https://www.we-online.com/redexpert/spec/885012209073?ad, Design Item ID=885012209073, Dissipation Factor=10%, Height=2.5mm, Length=3.2mm, Match Code=WCAP-CSGP, Mounting Technology=SMT, Packaging="Tape and Reel", Pins=2, Source=WCAP-CSGP.SchLib, Technical Reference=X7R1210106K050DFCT10000, Usage="General Purpose", Width=2.5mm
C17 C21: library part CMP-001-00108-13, "Capacitor MLCC, General Purpose, size 0603, X7R, 4.7nF, +/-5%, 50V", Capacitor Type=MLCC, Case/Package=0603, Dielectric=X7R, JLCPCB Basic part=Yes, JLCPCB Part #=C53987, Max Operating Temperature=125°C, Min Operating Temperature=-55°C, Tolerance=5%, Voltage Rating=50V, Height=0.8mm, Length=1.6mm, Mounting Technology=SMT, Pins=2, RoHS Compliant=Yes, Usage="General Purpose", Width=0.8mm
C18 C23: library part CMP-001-00153-1, "Alum. Electrolytic Cap 1000F 10V 10MM Radial Wcap-atli; Lifetime 5000H +105°C", Case/Package=Radial, Leakage Current=100µA, Max Operating Temperature=105°C, Min Operating Temperature=-55°C, Ripple Current=1.4A, Tolerance=20%, Voltage Rating=10V, Diameter=10mm, Height - Seated (Max)=17.4752mm, Impedance=42mΩ, Lead Pitch=5.0038mm, Length=16mm, Life (Hours)=5000hours, Mounting Technology="Through Hole", Packaging="Cut Tape (CT)", Pitch=5mm, Polarity=Polar, RoHS=Compliant
C19: library part CMP-001-00092-16, "Capacitor MLCC, General Purpose, size 0603, C0G, 68pF, +/-5%, 50V", Capacitor Type=MLCC, Case/Package=0603, Dielectric=C0G, JLCPCB Part #=C62782, Max Operating Temperature=125°C, Min Operating Temperature=-55°C, Temperature Coefficient=30ppm/°C, Tolerance=5%, Voltage Rating=50V, Height=0.8mm, Length=1.6mm, Mounting Technology=SMT, Packaging="Cut Tape", Pins=2, REACH SVHC=Unknown, RoHS Compliant=True, Usage="General Purpose", Width=0.8mm
D1: library part CMP-002-001076-16, "WL-SMCW Mono-color Chip LED Waterclear, size 0603, Green, 3.3V, 40°", Case/Size Code=0603, Emitting Color=Green, Forward Voltage=3.3V, JLCPCB Part #=C7429914, Manufacturer="Wurth Elektronik", Operating Temperature Max=85°C, Operating Temperature Min=-40°C, Category="Signal LEDs", Chip Technology=InGaN, Component Type=Standard, ComponentLink1Description="Website Link", ComponentLink1URL=https://www.we-online.com/redexpert/article/150060GS84000?ad, ComponentLink2Description="Datasheet Link", ComponentLink2URL=https://www.we-online.com/redexpert/spec/150060GS84000?ad, Design Item ID=150060GS84000, Dominant Wavelength=525nm, Height=0.95mm, Length=1.6mm, Luminous Intensity=3000mcd, Manufacturer Part Number=150060GS84000, Match Code=WL-SMCW, Mount="Surface Mount", Packaging="Tape and Reel", Page Part #=MOVPA-0270A, Peak Wavelength=520nm, Pin Count=2, Source=WL-SMCW.SchLib, Viewing Angle=40°, Width=0.8mm
D2 D3: library part CMP-004-00001-5, "Small Signal Diode, 75 V, 0.15 A, -55 to 150 degC, 2-Pin SOD-323, RoHS, Tape and Reel", Capacitance=-323f, Case/Package=SOD-323, Forward Current=150mA, Forward Voltage=1V, JLCPCB Basic part=Yes, JLCPCB Part #=C2128, Manufacturer=Fairchild, Max Operating Temperature=150°C, Max Reverse Voltage (DC)=70V, Min Operating Temperature=-55°C, Package Description="2-Pin Small Outline Diode Flat Lead, Body 1.7 x 1.25 mm", Package Quantity=3000, Peak Reverse Current=5uA, Datasheet URL=https://www.fairchildsemi.com/datasheets/1N/1N4148WS.pdf, Datasheet Version="Rev. 1.2, 03/2015", Manufacturer URL=https://www.fairchildsemi.com/, Mounting Technology=SM, Package Reference=SOD-323, Packaging=TapeandReel, Pins=2, Recovery Time=4ns, RoHS Compliant=True
FD1 FD2 FD3: library part CMP-00028-00005-14, "Fiducial - Round 1x2mm", Pins=0
J1 J5 J7: library part CMP-002-00128-5, "3.5 mm, Stereo, Right Angle, Surface Mount (SMT), Audio Jack Connector", Color=Black, JLCPCB Part #=C381135, Connector Type=Jack, Number of Conductors=3, Number of Ports=1, Orientation=Horizontal, Shielding=Unshielded
J2: library part CMP-002-00035-13, "Ultra Small Surface Mount Coaxial Connector, 50 Ohm, -40 to 90 degC, 3-Pin SMD, RoHS, Tape and Reel", Case/Package=U.FL-R-SMT, JLCPCB Part #=C88373, Manufacturer="Hirose Electric", Max Operating Temperature=90°C, Min Operating Temperature=-40°C, Package Description="3-Pin Surface Mount Device, Body 2.6 x 2.6 mm", Package Quantity=2500, Resistance=50Ohm, Connector Type=RF&Coax, Contact Material=Brass, Contact Plating=Gold, Datasheet URL=https://www.hirose.com/product/en/download_file/key_name/U.FL/category/Catalog/doc_file_id/31697/?file_category_id=4&item_id=15&is_series=1, Datasheet Version=Aug-16, Fastening Type=Snap, Impedance=50Ohm, Manufacturer URL=https://www.hirose.com, Mounting Technology=SM, Package Reference=U.FL-R-SMT, Packaging=TapeandReel, RoHS Compliant=True
J3 J4 J6: library part CMP-047-000040-16, "WR-WTB SMT Male Horizontal Shrouded Header, pitch 2mm, 2p", Contact Resistance=20mOhm, JLCPCB Part #=C295747, Operating Temperature="-25 to +85degC", Rated Current=2A, Withstanding Voltage=800VAC, Working Voltage=100VAC, Component Type=Standard, ComponentLink1Description=Manufacturer, ComponentLink1URL=http://www.we-online.de, ComponentLink2Description=Datasheet, ComponentLink2URL=https://www.we-online.com/catalog/datasheet/620102131822.pdf, Design Item ID=620102131822, Gender=Male, Mounting Technology=SMT, Packaging="Tape and Reel", Page Part #=K620102131822, Part Number=620102131822, Pin Count=2, Pin Number=2, Pitch=2mm, Published Date="January 2020", Publisher="Wurth Elektronik", Source=WR-WTB_2.00mm.SchLib, Type=Horizontal
L1: library part CMP-186-000045-2, "WE-RFI Ferrite SMT Inductor, size 1008, 2200nH, 200mA, 160MHz", Case/Size Code=1008, DC Resistance Max=2350mOhm, Inductance=2200nH, Inductance Tolerance=+/-5%, Manufacturer="Wurth Elektronik", Operating Temperature Max=85°C, Operating Temperature Min=-40°C, Rated Current=200mA, Self Resonant Frequency=160MHz, Category="RF Inductors", Component Type=Standard, ComponentLink1Description="Website Link", ComponentLink1URL=https://www.we-online.com/redexpert/article/744762322A?ad, ComponentLink2Description="Datasheet Link", ComponentLink2URL=https://www.we-online.com/redexpert/spec/744762322A?ad, Design Item ID=744762322A, Height=1.6mm, Impedance @100MHz=1550Ohm, Impedance Max=105000Ohm, Impedance Max Test Condition=270MHz, Length=2.5mm, Manufacturer Part Number=744762322A, Match Code=WE-RFI, Mount="Surface Mount", Packaging="Tape and Reel", Pin Count=2, Q Factor Min=20, Source=WE-RFI.SchLib, Width=2mm
MP1 MP2 MP3 MP4: library part CMP-00028-00004-15, "Mounting hole.  Add this so that mounting holes placed in your design don't automagically disappear when you import changes from the schematic.", Pins=1
PCB1: library part CMP-000006-5, "Layer indicator for 4 layers"
Q1 Q2: library part CMP-014-00026-5, "NPN General Purpose Amplifier, 40 V, 0.2 A, -55 to 150 degC, 3-Pin SOT23, RoHS, Tape and Reel", Case/Package=TO-236-3, Frequency=300MHz, JLCPCB Basic part=Yes, JLCPCB Part #=C20526, Manufacturer="Fairchild Semiconductor", Max Operating Temperature=150°C, Min Operating Temperature=-55°C, Package Description="3-Pin Small Outline Transistor, Body 2.92 x 1.325 mm, Pitch 0.95 mm", Package Quantity=3000, Package Reference=SOT23-3, Package Version="Rev. 12, 03/2016", Power=625mW, Datasheet URL=https://www.fairchildsemi.com/datasheets/MM/MMBT3904.pdf, Datasheet Version="Rev. 1.1.0, 10/2014", Elements=1, hFE Min=100, Manufacturer URL=https://www.fairchildsemi.com/, Mounting Technology=SM, Package URL=http://www.fairchildsemi.com/dwg/MA/MA03D.pdf, Packaging=TapeandReel, Pins=3, RoHS Compliant=True, Vce Max=300mV
Q3 Q5: library part CMP-013-00066-1, "Trans GP BJT NPN 40V 2A 730mW Automotive 3-Pin SOT-23 T/R", Collector Emitter Saturation Voltage=320mV, Collector Emitter Voltage (VCEO)=40V, JLCPCB Basic part=No, JLCPCB Part #=C513079, Max Collector Current=2A, Max Operating Temperature=150°C, Max Power Dissipation=730mW, Min Operating Temperature=-55°C, Transition Frequency=100MHz, China RoHS=Compliant, hFE Min=150, Lifecycle Status=Production, Number of Elements=1, Number of Terminals=3, REACH SVHC=Yes, RoHS=Compliant
Q4: library part CMP-013-00067-2, "Bipolar Transistors - BJT 40V PNP SS Mid-Perf Transistor", Collector Emitter Voltage (VCEO)=40V, JLCPCB Basic part=No, JLCPCB Part #=C3199979, Max Collector Current=2A, Min Operating Temperature=-55°C, Transition Frequency=100MHz, China RoHS=Compliant, hFE Min=100, Lifecycle Status=Production, Number of Elements=1, Number of Terminals=3, REACH SVHC=Yes, RoHS=Compliant
R1: library part CMP-009-00285-10, "Res Thick Film 0603 8.2K Ohm 1% 0.1W(1/10W) ±100ppm/C Pad SMD T/R", Case/Package=0603, JLCPCB Part #=C25981, Max Operating Temperature=155°C, Min Operating Temperature=-55°C, Power Rating=100mW, Resistor Type="Thick Film", Temperature Coefficient=100ppm/°C, Tolerance=1%, Voltage Rating=50V, Elements=1, Features="Moisture Resistant", Lead Free="Lead Free", Mounting Technology=SMT, Pins=2, Reach SVHC Compliant=Yes, RoHS Compliant=Yes, Usage="General Purpose"
R2 R3 R18 R19: library part CMP-009-00006-27, "Chip Jumper, Thick Film, Jumper, 0603, 100mW, 1A, 0 Ohm, <50 mOhm", Case/Package=0603, Current Rating=1A, JLCPCB Basic part=Yes, JLCPCB Part #=C21189, Max Operating Temperature=155°C, Min Operating Temperature=-55°C, Power Rating=100mW, Resistor Type="Thick Film", Tolerance="50 mOhm", Voltage Rating=75V, Elements=1, FLIR Part #=YRES0E-1, Mounting Technology=SMT, Page Part #=ROQJ0000, Pins=2, RoHS Compliant=True, Usage=Jumper
R4: library part CMP-009-00017-29, "Chip Resistor, Thick Film, General Purpose, 0603, 100mW, 50V, 10 kOhm, +/-1%", Case/Package=0603, JLCPCB Basic part=Yes, JLCPCB Part #=C25804, Max Operating Temperature=155°C, Min Operating Temperature=-55°C, Power Rating=100mW, Resistor Type="Thick Film", Tolerance=1%, Voltage Rating=50V, Elements=1, FLIR Part #=YRES10K-1, Mounting Technology=SMT, Page Part #=ROQF1002, Pins=2, RoHS Compliant=Yes, Usage="General Purpose"
R5: library part CMP-009-00257-14, "Res Thick Film 0603 2.7K Ohm 1% 0.1W(1/10W) ±100ppm/C Pad SMD Automotive T/R", Case/Package=0603, JLCPCB Part #=C13167, Max Operating Temperature=155°C, Min Operating Temperature=-55°C, Power Rating=100mW, Resistor Type="Thick Film", Temperature Coefficient=100ppm/°C, Tolerance=1%, Voltage Rating=75V, Elements=1, Features="Automotive AEC-Q200", Lead Free="Lead Free", Mounting Technology=SMT, Packaging="Tape and Reel", Pins=2, RoHS Compliant=Yes, Usage=Precision
R6: library part CMP-009-00338-5, "Res Thick Film 0603 51 Ohm 1% 1/10W ±100ppm/°C Molded SMD SMD Paper T/R", Case/Package=0603, JLCPCB Part #=C23197, Max Operating Temperature=155°C, Min Operating Temperature=-55°C, Power Rating=100mW, Resistor Type="Thick Film", Temperature Coefficient=100ppm/°C, Tolerance=1%, Elements=1, Features="Automotive AEC-Q200", Lead Free="Lead Free", Mounting Technology=SMT, Pins=2, Radiation Hardening=No, RoHS Compliant=Yes, Usage="General Purpose"
R7: library part CMP-009-00281-11, "Res Thick Film 0603 120K Ohm 1% 0.1W(1/10W) ±100ppm/°C Pad SMD T/R", Case/Package=0603, JLCPCB Part #=C25808, Max Operating Temperature=155°C, Min Operating Temperature=-55°C, Power Rating=100mW, Resistor Type="Thick Film", Tolerance=1%, Elements=1, FLIR Part #=YRES120K-1, Mounting Technology=SMT, Pins=2, Usage="General Purpose"
R8: library part CMP-009-00422-1, "Potentiometer, Carbon, 0.05W, 100000ohm, 20V, 20% +/-Tol, 1 Turn(s)", Case/Package=Radial, JLCPCB Part #=C5154557, Max Operating Temperature=50°C, Max Power Dissipation=50mW, Min Operating Temperature=-10°C, Tolerance=20%, Working Voltage=20V, Actuator Diameter=5.9944mm, Actuator Length=19.9898mm, Composition=Carbon, Contact Plating=Tin, Depth=12.5mm, Height=6.8mm, Length=11.4mm, Lifecycle Status=Production, Military Standard=Not, Mounting Technology="Brackets, Snap-In, Through Hole", Number of Gangs=1, Number of Terminals=3, Number of Turns=1, Packaging=Bulk, Power Dissipation=50mW, Power Rating=50mW, Radiation Hardening=No, REACH SVHC=Yes, RoHS=Compliant, Schedule B=8533400080, Taper=Linear, Termination=Pin, Type=Potentiometer, Width=6.8mm
R9: library part CMP-009-00195-22, "Chip Resistor, Thick Film, General Purpose, 0603, 100mW, 50V, 47 kOhm, +/-1%", Case/Package=0603, JLCPCB Part #=C25819, Max Operating Temperature=155°C, Min Operating Temperature=-55°C, Power Rating=100mW, Resistor Type="Thick Film", Temperature Coefficient=100ppm/°C, Tolerance=1%, Voltage Rating=50V, Elements=1, FLIR Part #=YRES47K-1, Mounting Technology=SMT, Page Part #=ROQF4702, Pins=2, REACH SVHC="No SVHC", Usage="General Purpose"
R10: library part CMP-009-00245-17, "Chip Resistor, Thick Film, General Purpose, 0603, 100mW, 50V, 22 kOhm, +/-1%", Case/Package=0603, JLCPCB Part #=C31850, Max Operating Temperature=155°C, Min Operating Temperature=-55°C, Power Rating=100mW, Resistor Type="Thick Film", Tolerance=1%, Voltage Rating=50V, Elements=1, Mounting Technology=SMT, Pins=2, RoHS Compliant=Yes, Usage="General Purpose"
R11: library part CMP-009-00370-6, "SMD Chip Resistor, 390 kOhm, ± 1%, 100 mW, 0603 [1608 Metric], Thick Film, General Purpose", Case Code (Imperial)=0603, Case Code (Metric)=1608, JLCPCB Part #=C23150, Max Operating Temperature=155°C, Max Power Dissipation=100mW, Min Operating Temperature=-55°C, Resistance Tolerance=1%, Resistor Type="Thick Film", Temperature Coefficient=100ppm/°C, Voltage Rating=50V, Working Voltage=75V, Case/Package=0603, Construction=Rectangular, Depth=0.8mm, Features="Moisture Resistant", FLIR Part #=YRES390K-1, Height=0.45mm, Lead Free="Lead Free", Length=1.6mm, Military Standard=Not, Number of Terminations=2, Packaging="Tape and Reel", Pins=2, Power Rating=100mW, Reach SVHC Compliant=Unknown, RoHS Compliant=Yes, Series=RC, Technology="THICK FILM", Termination=SMD/SMT, Tolerance=1%, Usage="General Purpose", Voltage Rating (AC)=50V, Voltage Rating (DC)=50V, Width=0.8mm
R12: library part CMP-009-00214-17, "Chip Resistor, Thick Film, General Purpose, 0603, 100mW, 50V, 33 kOhm, +/-1%", Case/Package=0603, JLCPCB Part #=C4216, Max Operating Temperature=155°C, Min Operating Temperature=-55°C, Power Rating=100mW, Resistor Type="Thick Film", Tolerance=1%, Voltage Rating=50V, Elements=1, Mounting Technology=SMT, Pins=2, RoHS Compliant=Yes, Usage="General Purpose"
R13: library part CMP-009-00393-2, "SMD Chip Resistor, 680 Ohm, ï¿½ 1%, 100 mW, 0603 [1608 Metric], Thick Film, Precision", Case Code (Imperial)=0603, Case Code (Metric)=1608, JLCPCB Part #=C23228, Max Operating Temperature=155°C, Max Power Dissipation=100mW, Min Operating Temperature=-55°C, Package Quantity=1, Resistance Tolerance=1%, Resistor Type="Thick Film", Temperature Coefficient=100ppm/°C, Voltage Rating=75V, Case/Package=0603, Construction=Rectangular, Contact Plating=Tin, Depth=0.8mm, Features="Automotive AEC-Q200", Height=0.022inch, Lead Free="Lead Free", Length=1.6mm, Military Standard=Not, Mounting Technology="Surface Mount", Number of Terminations=2, Packaging="Tape and Reel", Page Part #=ROQF6800, Pins=2, Power Rating=100mW, Radiation Hardening=No, Reach SVHC Compliant=No, RoHS Compliant=Yes, Series=ERJ, Termination=SMD/SMT, Tolerance=1%, Voltage Rating (DC)=75V, Width=0.8mm
R14: library part CMP-009-00014-30, "Chip Resistor, Thick Film, General Purpose, 0603, 100mW, 50V, 1 kOhm, +/-1%", Case/Package=0603, JLCPCB Basic part=Yes, JLCPCB Part #=C21190, Max Operating Temperature=155°C, Min Operating Temperature=-55°C, Power Rating=100mW, Resistor Type="Thick Film", Tolerance=1%, Voltage Rating=50V, Elements=1, FLIR Part #=YRES1K-1, Mounting Technology=SMT, Page Part #=ROQF1001, Pins=2, RoHS Compliant=Yes, Usage="General Purpose"
R15: library part CMP-009-00206-23, "Chip Resistor, Thick Film, General Purpose, 0603, 100mW, 50V, 18 kOhm, +/-1%", Case/Package=0603, JLCPCB Part #=C25810, Max Operating Temperature=155°C, Min Operating Temperature=-55°C, Power Rating=100mW, Resistor Type="Thick Film", Tolerance=1%, Voltage Rating=50V, Elements=1, Mounting Technology=SMT, Page Part #=ROQF1802, Pins=2, RoHS Compliant=Yes, Usage="General Purpose"
R16 R20: library part CMP-009-00323-9, "Chip Resistor, Thick Film, General Purpose, 0603, 100mW, 50V, 2.4 kOhm, +/-1%", Case/Package=0603, JLCPCB Part #=C22940, Max Operating Temperature=155°C, Min Operating Temperature=-55°C, Power Rating=100mW, Resistor Type="Thick Film", Temperature Coefficient=100ppm/°C, Tolerance=1%, Voltage Rating=50V, Elements=1, Mounting Technology=SMT, Pins=2, Usage="General Purpose"
R17: library part CMP-009-00287-10, "Res Thick Film 0603 5.6K Ohm 1% 0.1W(1/10W) ±100ppm/C Pad SMD T/R", Case/Package=0603, JLCPCB Part #=C23189, Max Operating Temperature=155°C, Min Operating Temperature=-55°C, Power Rating=100mW, Resistor Type="Thick Film", Temperature Coefficient=100ppm/°C, Tolerance=1%, Voltage Rating=75V, Elements=1, Features="Moisture Resistant", Lead Free="Lead Free", Mounting Technology=SMT, Pins=2, RoHS Compliant=Yes, Usage="General Purpose"
TP1 TP2: library part CMP-027-000000-20, "Testpad land", Component Type=Standard, Design Item ID=Testpad, Pin Count=1
U1: library part CMP-015-00050-1, "Modulator / Demodulator Wide-B FM IF Demod 1.8 to 9V 2.9mA 15", JLCPCB Part #=C5200653, RoHS=Non-Compliant

## Via types
v1: diameter 0.6, hole 0.3, Top Layer to Bottom Layer, tented both sides, 173 vias

## Nets (pads, with @x,y where several pads share a name; then routed paths per layer and width w, separated by ;. In a path a pad name is that pad's centre, name@x,y a point inside that pad or via, vN(x,y) a via of type N, cw(c..) or ccw(c..) an arc to the next point about the centre after c; other vN are vias at no path point)
+5V: C2.2 C8.2 C13.2 C17.2 C23.1 D1.2 J1.1 J4.1 J6.1 Q1.3 Q2.3 Q3.3 R7.2 TP1.1 U1.3 | length 8.2
  Top Layer w0.25: U1.3 22.525,46.825 22.933,47.233 22.933,47.833 v1(23,47.9) ; v1(24.9,40.9) 24.967,40.833 24.967,40.333 C13.2 ; v1(25.5,30.8) R7.2 ; Q1.3 28.03,40.1 v1(28.8,40.1) ; v1(30.295,12.9) 30.97,12.9 Q3.3 ; v1(30.795,40.1) 31.47,40.1 Q2.3 ; C17.2 v1(34.4,13.2)
  other v1: 30,1 32,1 34,1 36,1 38,1 40,1 42,1 30,3 32,3 34,3 36,3 38,3 40,3 42,3 30,5 32,5 34,5 36,5 38,5 40,5 42,5 36,7 38,7 40,7 42,7 30,9 32,9 34,9 30,11 32,11 34,11 46.6,16 46.6,17 46.6,17.8 40.5,21 41.5,21 42.5,21 7,36.8 8,36.8 9,36.8 10,36.8
AUDIO: J5.4 J7.4 | length 28.1
  Top Layer w0.25: J7.4 13.6,16.905 14.662,17.967 14.867,17.967 19.65,22.75 20.65,22.75 27.2,29.3 J5.4
GND: C2.1 C3.1 C4.1 C8.1 C9.1 C10.1 C11.1 C13.1 C21.2 C23.2 J2.1 J2.2 J3.2 J3.MP1 J3.MP2 J4.2 J4.MP1 J4.MP2 J5.1 J6.MP1 J6.MP2 J7.1 MP1.1 MP2.1 MP3.1 MP4.1 Q4.3 Q5.2 R4.1 R6.1 R8.1 R8.S1 R8.S2 R10.1 R11.1 R12.1 R13.1 R17.1 TP2.1 U1.6 | length 16.3
  Top Layer w0.25: R4.1 v1(11,42.475) ; v1(11.8,44) C4.1 ; v1(11.8,45.5) C3.1 ; R6.1 v1(15.2,48.5) ; v1(15,22.3) R10.1 ; v1(15.325,43.5) C11.1 ; U1.6 16.312,46.863 17.363,46.863 v1(17.4,46.9) ; R17.1 v1(20.5,19.175) ; Q5.2 21.615,15.1 v1(22.3,15.1) ; C13.1 24.033,40.333 24.033,40.833 v1(24.1,40.9) ; v1(23.89,47.897) 23.957,47.83 23.957,47.343 C8.1 ; v1(24,30.8) R11.1 ; v1(25,12.325) C21.2 ; R12.1 v1(26.4,34.7) ; Q4.3 27.53,12.9 v1(28.205,12.9) ; C9.1 v1(29.4,43.2) ; v1(29.8,42) C10.1 ; v1(33.1,39.3) R13.1
  other v1: 22,1 24,1 26,1 28,1 4,1.75 46,1.75 2.875,2.051 5.125,2.051 44.875,2.051 47.125,2.051 2.051,2.875 5.949,2.875 44.051,2.875 47.949,2.875 22,3 24,3 26,3 28,3 1.75,4 6.25,4 43.75,4 48.25,4 22,5 24,5 26,5 28,5 2.051,5.125 5.949,5.125 44.051,5.125 47.949,5.125 2.875,5.949 5.125,5.949 44.875,5.949 47.125,5.949 4,6.25 46,6.25 22,7 7,8.5 22,9 24,9 26,9 28,9 7,9.5 7,10.5 22,11 24,11 26,11 28,11 46.5,21 47.5,21 48.5,21 46.5,25 47.5,25 48.5,25 1.5,32.8 2.5,32.8 3.5,32.8 7,32.8 8,32.8 9,32.8 10,32.8 11,32.8 43.2,35.6 43.2,36.5 1.5,36.8 2.5,36.8 3.5,36.8 43.2,37.5 36,41 36,42 36,43 4,43.75 46,43.75 2.875,44.051 5.125,44.051 44.875,44.051 47.125,44.051 8.7,44.1 9.5,44.1 10.3,44.1 2.051,44.875 5.949,44.875 44.051,44.875 47.949,44.875 1.75,46 6.25,46 43.75,46 48.25,46 36,46.5 40,46.5 2.051,47.125 5.949,47.125 44.051,47.125 47.949,47.125 36,47.5 40,47.5 2.875,47.949 5.125,47.949 44.875,47.949 47.125,47.949 4,48.25 46,48.25 36,48.5 40,48.5 8.7,49 9.5,49 10.3,49
NetC1_1: C1.1 U1.5 | length 2.2
  Top Layer w0.25: C1.1 14.3,47.025 14.75,47.475 U1.5
NetC1_2: C1.2 J2.3 R6.2 | length 3.4
  Top Layer w0.25: J2.3 12.225,46.5 12.7,46.975 C1.2 R6.2
NetC3_2: C3.2 U1.7 | length 2.3
  Top Layer w0.25: C3.2 14.3,45.525 14.95,46.175 U1.7
NetC4_2: C4.2 U1.8 | length 2.6
  Top Layer w0.25: C4.2 14.3,44.025 14.65,44.375 14.675,44.375 15.825,45.525 U1.8
NetC5_1: C5.1 C6.1 C7.1 C9.2 L1.1 R5.1 | length 10.9
  Top Layer w0.25: C7.1 23.125,43.825 26.375,43.825 L1.1 27.15,43.95 27.65,44.45 28.15,44.45 C9.2 ; R5.1 C9.2 ; C5.1 31.25,43.55 30,44.8 C9.2
NetC5_2: C5.2 C6.2 C7.2 L1.2 R5.2 U1.2 | length 12.6
  Top Layer w0.25: U1.2 22.1,46.175 22.975,45.3 C7.2 C6.2 24.775,45.575 25.375,45.575 25.85,46.05 L1.2 27.15,46.05 27.475,46.375 27.475,46.8 28.475,47.8 R5.2 28.675,47.625 31.325,47.625 C5.2
NetC10_2: C10.2 J3.1 U1.4 | length 29.3
  Top Layer w0.25: U1.4 21.175,47.475 22.4,48.7 32.7,48.7 33.513,47.887 33.513,42 ; C10.2 33.513,42 ; J3.1 39,40.5 38,39.5 35.4,39.5 33.513,41.387 33.513,42
NetC11_2: C11.2 C12.1 R1.1 | length 16.6
  Top Layer w0.25: C12.1 16.7,29.5 17.8,30.6 C11.2 R1.1
NetC12_2: C12.2 R8.3 | length 2
  Top Layer w0.25: R8.3 C12.2@15,27
NetC14_1: C14.1 R8.2 R10.2 | length 7.2
  Top Layer w0.25: R8.2 R10.2@15,24.5 ; R10.2 17.1,24.8 18.8,26.5 C14.1
NetC14_2: C14.2 Q1.1 R9.1 | length 12.4
  Top Layer w0.25: C14.2 19.5,31.825 23.975,36.3 R9.1 ; R9.1@24.025,36.3 25.655,37.93 Q1.1
NetC15_1: C15.1 R7.1 R9.2 R11.2 | length 5.5
  Top Layer w0.25: R9.2 R11.2 R7.1 27.7,33.3 C15.1
NetC15_2: C15.2 Q1.2 Q2.1 R12.2 | length 7
  Top Layer w0.25: R12.2 27.7,36.3 C15.2 28.295,36 28.915,36.62 Q1.2 ; Q1.2@28.915,38.17 Q1.2 ; Q2.1 Q1.2
NetC16_1: C16.1 Q2.2 R13.2 | length 4.2
  Top Layer w0.25: C16.1 31.795,36 32.415,36.62 Q2.2 32.415,37.88 32.595,37.7 R13.2
NetC16_2: C16.2 R18.2 R19.2 | length 4
  Top Layer w0.25: C16.2 31.8,33.3 R19.2 R18.2
NetC17_1: C17.1 D2.2 Q3.1 R14.2 | length 5
  Top Layer w0.25: D2.2@31.915,16.4 Q3.1 31.915,14.8 C17.1 ; D2.2 32.4,16.4 32.415,16.4 33.5,16.4 R14.2
NetC18_1: C18.1 R2.1 R3.1 R14.1 | length 9.2
  Top Layer w0.25: C18.1 31.936,24.564 31.936,24.289 35.2,21.025 R2.1 R3.1 35.2,19.475 34.85,19.125 34.35,19.125 33.525,18.3 R14.1
NetC18_2: C18.2 C19.2 Q3.2 Q4.2 R15.2 | length 2.9
  Top Layer w0.25: C19.2 R15.2 24.9,18.3
NetC19_1: C19.1 C22.1 Q5.1 R15.1 R17.2 | length 7.7
  Top Layer w0.25: C22.1 18.586,17.414 19.686,17.414 20.4,16.7 R15.1 ; Q5.1 23.557,15.213 R15.1@23.557,16.7
NetC21_1: C21.1 D3.1 Q4.1 Q5.3 | length 9.2
  Top Layer w0.25: Q5.3 22.5,13.17 22.68,13.35 23.025,13.35 24.125,14.45 24.65,14.45 C21.1 25.025,14.8 25.375,14.45 25.375,14.425 25.6,14.2 27.785,14.2 28.457,14.873 28.457,16.342 28.5,16.385 D3.1@28.343,16.543
NetC22_2: C22.2 R16.2 R20.2 | length 3.9
  Top Layer w0.25: C22.2 18.18,15 18.8,14.38 R16.2
NetD1_1: D1.1 R4.2 | length 1.4
  Top Layer w0.25: D1.1 R4.2
NetD2_1: D2.1 D3.2 | length 3.5
  Top Layer w0.25: D3.2@28.5,18.615 D2.1@32,18.615
NetJ1_2: J1.2 R3.2 | length 3.4
  Top Layer w0.25: R3.2 36.8,18.4 38.2,17 J1.2
NetJ1_3: J1.3 R2.2 | length 14.7
  Top Layer w0.25: R2.2 38,21 42.3,16.7 J1.3
NetJ1_4: J1.4 J6.2 | length 19.7
  Top Layer w0.25: J1.4 36.4,15.913 36,16.313 36,21.565 38.435,24 J6.2@42.25,24
NetJ5_2: J5.2 R18.1 | length 4.4
  Top Layer w0.25: R18.1 35.382,36.3 35.782,36.7 J5.2
NetJ5_3: J5.3 R19.1 | length 9.5
  Top Layer w0.25: R19.1 40.2,31.7 42.3,29.6 J5.3
NetJ7_2: J7.2 R16.1 | length 6.3
  Top Layer w0.25: J7.2 15,9.3 16.825,11.125 16.85,11.125 17.2,11.475 R16.1
NetJ7_3: J7.3 R20.1 | length 11
  Top Layer w0.25: J7.3 7.7,16.687 8.762,15.625 10.912,15.625 13.537,13 R20.1
NetR1_2: R1.2 U1.1 | length 2.1
  Top Layer w0.25: U1.1 20.8,45.45 R1.2
pads on no net: FD1.0 FD2.0 FD3.0 J1.5 J1.MP1 J1.MP2 J5.5 J5.MP1 J5.MP2 J7.5 J7.MP1 J7.MP2

## Polygon pours and split planes (outlines as drawn)
NetC18_2 on Top Layer "NONET_L-01_P-001" (solid, remove dead copper, pour order 5): 23.2,19.307 24.47,19.307 24.47,12.92 25.72,12.92 27.1,14.3 32.7,14.3 32.7,22.3 28.7,26.3 25.3,26.3 23.2,24.2
+5V on Top Layer "+5V_L01_P001" (solid, remove dead copper, pour order 1): 29,14.3 36,14.3 36,7.6 42.5,7.6 42.5,0 29,0
GND on Top Layer "GND_L01_P000" (solid, remove dead copper, pour order 0): 27.6,14.3 20.5,14.3 20.5,0 29,0 29,14.3
GND on Layer 2 "GND_L02_P003" (solid, remove dead copper, pour order 3): 0.204,50 0.204,0 50.204,0 50.204,50
+5V on Layer 3 "+5V_L03_P002" (solid, remove dead copper, pour order 2): 0,50 0,0 50,0 50,50
GND on Bottom Layer "GND_L04_P004" (solid, remove dead copper, pour order 4): 0,50 50,50 50,0 0,0

## Other copper
Top Layer:
  rectangle net GND: 42.8,35.2 46.1,38.2
  rectangle net +5V: 40,20.5 43.5,22.6
  rectangle net +5V: 43.7,15.2 47,18.2
  rectangle net GND: 3.8,7.8 7.5,11
  region net GND: 4.4,30.7 4.4,38.8 0.7,38.8 0.7,30.7
  region net GND: 49.4,18.9 49.4,27 45.7,27 45.7,18.9
  rectangle net GND: 33.9,45.6 42,49.3
  rectangle net GND: 35.5,40 37.5,43.5
  rectangle net GND: 8.4,47.5 10.6,49.3
  region net GND: 10.6,45.6 8.4,45.6 8.4,43.8 10.6,43.8
  rectangle net GND: 6.5,32.4 11.6,34.5
  rectangle net +5V: 6.5,35.2 11.6,37.3

## Silkscreen, mask and mechanical layers (free items; w line width, h text height)
Top Overlay:
  text "+5V" at 15.25,35.319 h2.5
  text "GND" at 15.25,32.332 h2.5
Bottom Overlay:
  region: 19,9 11,9 11,1 19,1
  text ".board_name / .board_revision.-" at 34.503,18.185 h2.5
  text ".VersionControl_RevNumberShort" at 26.9,14.663 h2.5
Board outline:
  the board outline again, w0.1
Fab Notes:
  drawing of 196 lines, arcs and shapes, not listed
  text "Layer" at 54.691,46.94 h1.5
  text "Name" at 61.007,46.94 h1.5
  text "Material" at 73.503,46.94 h1.5
  text "Thickness" at 81.915,46.94 h1.5
  text "Constant" at 90.384,46.94 h1.5
  text "Board Layer Stack" at 98.899,46.94 h1.5
  text "Top Overlay" at 61.007,43.94 h1.5
  text "Top Solder" at 61.007,40.94 h1.5
  text "SM-001" at 73.503,40.94 h1.5
  text "0.025mm" at 81.915,40.94 h1.5
  text "4" at 90.384,40.94 h1.5
  text "1" at 54.691,37.94 h1.5
  text "Top Layer" at 61.007,37.94 h1.5
  text "CF-004" at 73.503,37.94 h1.5
  text "0.035mm" at 81.915,37.94 h1.5
  text "Dielectric 2" at 61.007,34.94 h1.5
  text "PP-022" at 73.503,34.94 h1.5
  text "0.208mm" at 81.915,34.94 h1.5
  text "4.5" at 90.384,34.94 h1.5
  text "2" at 54.691,31.94 h1.5
  text "Layer 2" at 61.007,31.94 h1.5
  text "CF-003" at 73.503,31.94 h1.5
  text "0.018mm" at 81.915,31.94 h1.5
  text "Dielectric 3" at 61.007,28.94 h1.5
  text "Core-042" at 73.503,28.94 h1.5
  text "0.991mm" at 81.915,28.94 h1.5
  text "4.6" at 90.384,28.94 h1.5
  text "3" at 54.691,25.94 h1.5
  text "Layer 3" at 61.007,25.94 h1.5
  text "CF-003" at 73.503,25.94 h1.5
  text "0.018mm" at 81.915,25.94 h1.5
  text "Dielectric 5" at 61.007,22.94 h1.5
  text "PP-022" at 73.503,22.94 h1.5
  text "0.208mm" at 81.915,22.94 h1.5
  text "4.5" at 90.384,22.94 h1.5
  text "4" at 54.691,19.94 h1.5
  text "Bottom Layer" at 61.007,19.94 h1.5
  text "CF-004" at 73.503,19.94 h1.5
  text "0.035mm" at 81.915,19.94 h1.5
  text "Bottom Solder" at 61.007,16.94 h1.5
  text "SM-001" at 73.503,16.94 h1.5
  text "0.025mm" at 81.915,16.94 h1.5
  text "4" at 90.384,16.94 h1.5
  text "Bottom Overlay" at 61.007,13.94 h1.5
  text "PCB Ordering guideline rigid / ----------------------------------------- / * Layer count : .Layer_Count / * Dimensions : .Board_Width x .Board_Height / * Deburring : Yes / * PCB Thickness : .Total_Thickness / * PCB Color : green / * Silkscreen : white / * Material type : >=FR4-TG155 / * Surface finish : Pb-Free HASL / * Outer copper weight : 1oz / * Inner copper weight : 0.5oz / * Layer stackup : JLC04161H-7628 / * Impedance control : No requirement / * Via covering : Plugged / * Minimum hole size : .Hole_Size_Min / * Board outline tolerance : +/- 0.2mm / * Mark on PCB : 2D barcode & Number | Data Matrix Code | .board_name _ABCDE_0001 | 8x8mm / * Gold fingers : No / * Castellated holes : No / * Press-fit holes : No / * Edge plating : No / * Blind slots : No / * UL Marking : No / * Hole count : .Hole_Count / * SMD solder joints : .PadSMD_Count / * Through-hole solder joints : .PadThru_Count" at 53,-25.21 h1.5

## Text inside footprints (layer, text, board x,y; h text height)
PCB1: Layer 2 "2" at 2.233,40.35 h0.8; Top Layer "1" at 1.367,40.35 h0.8; Bottom Layer "4" at 4.767,40.35 h0.8; Layer 3 "3" at 3.767,40.35 h0.8